# Allegro board DDS.brd
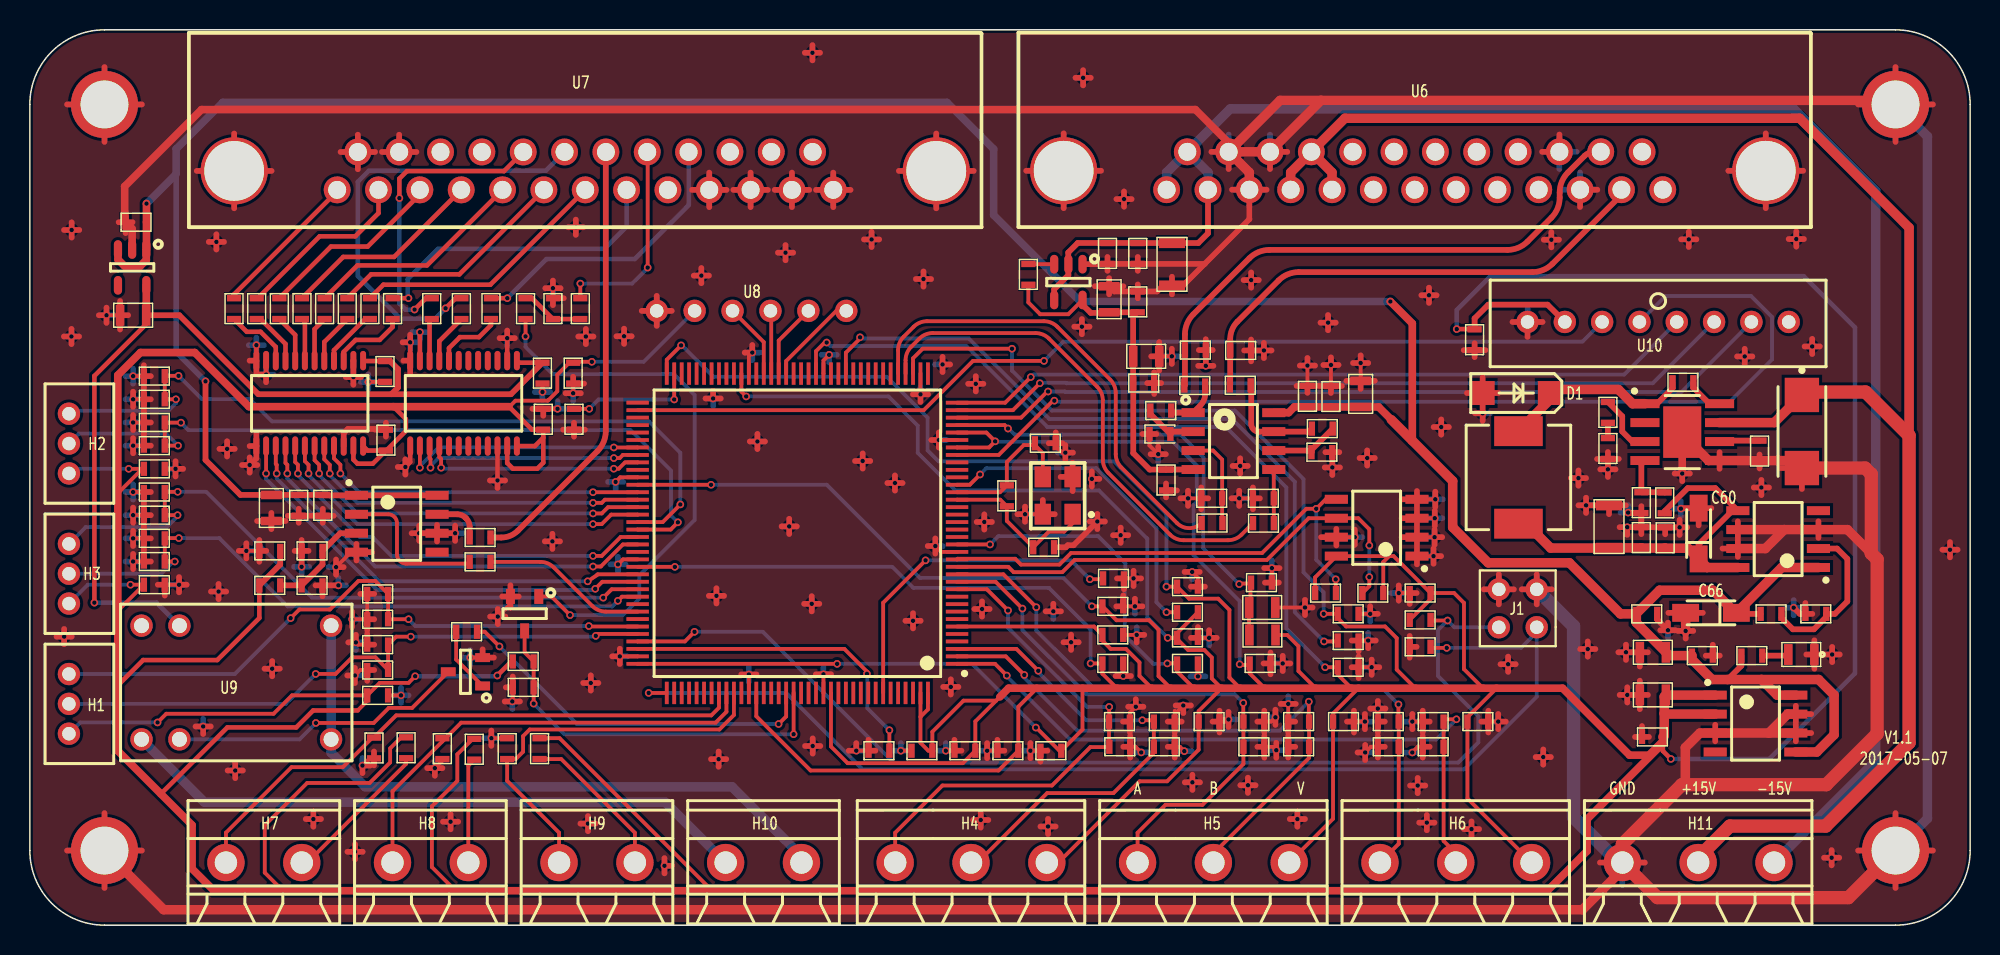
[diagram p0: board, top side]
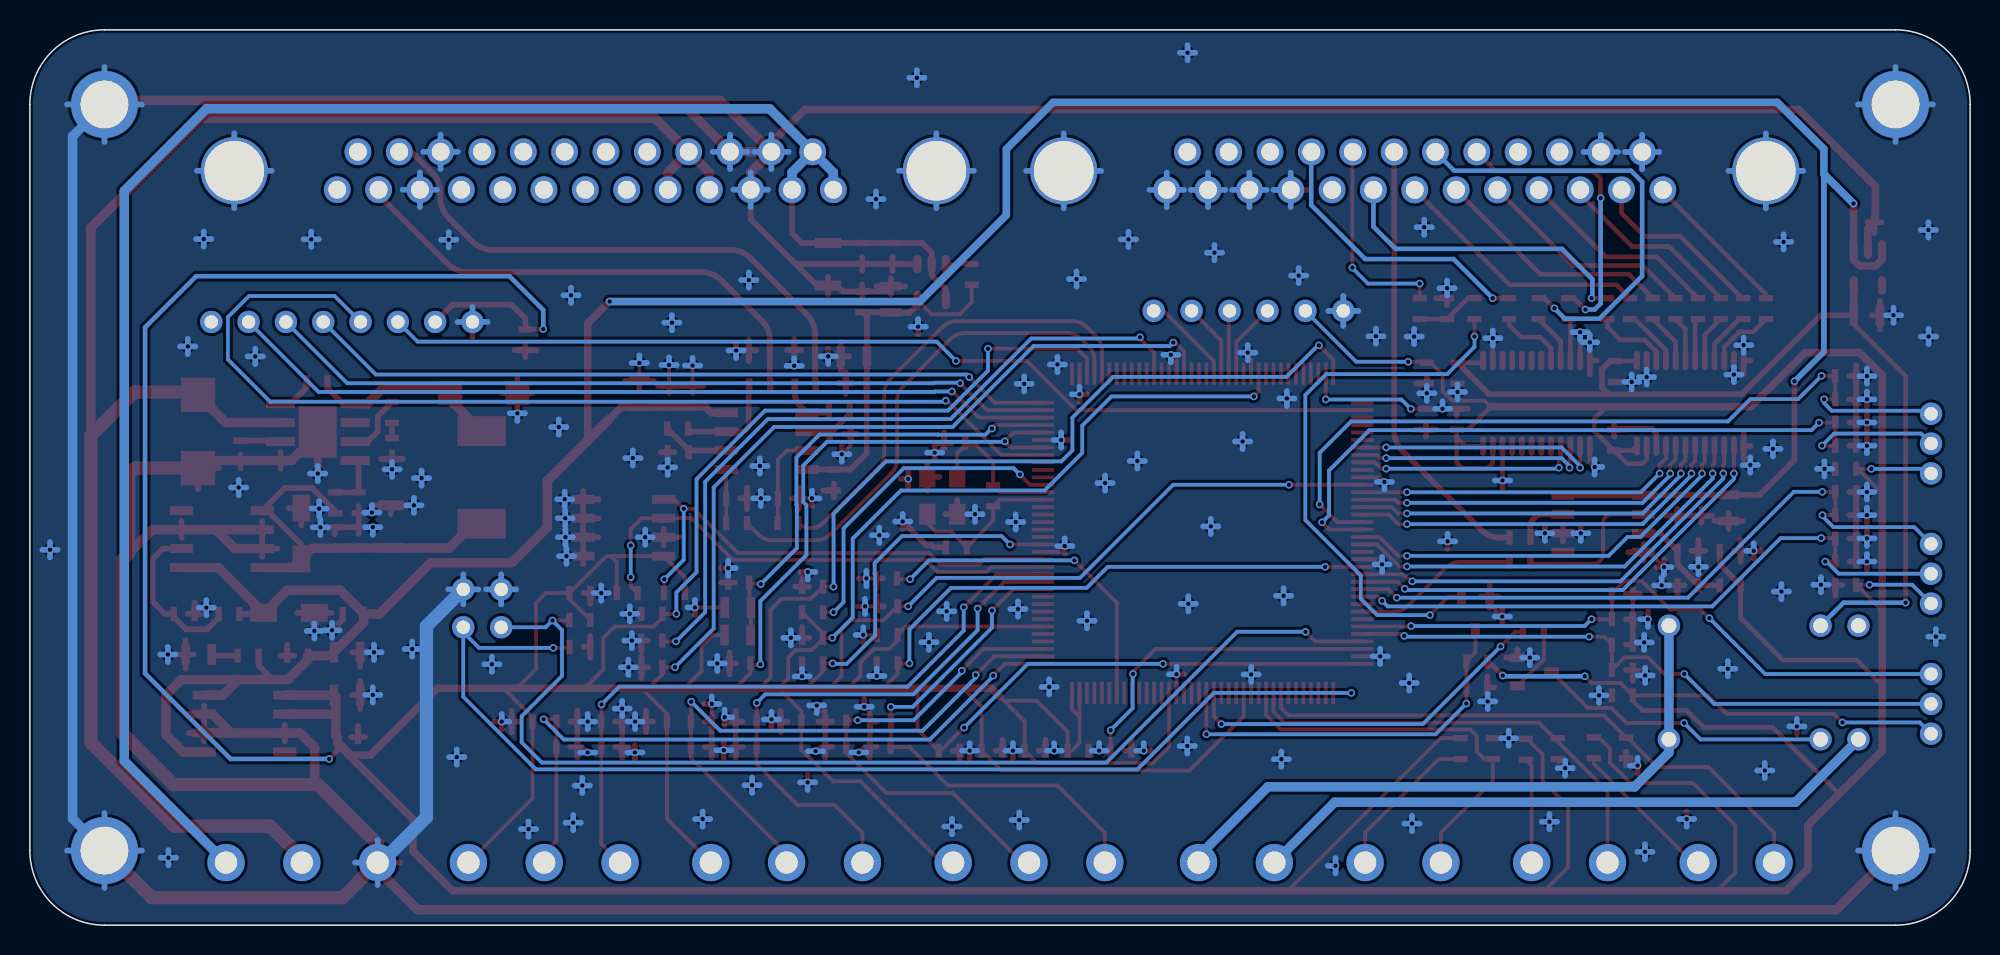
[diagram p1: board, bottom side, seen from below]

Outline 130 x 60 mm; copper layers: TOP, BOTTOM. Coordinates in mm from the lower left corner of the outline.
Outline path: 0,55 0,5 arc(1.46,1.46) 5,0 125,0 arc(128.54,1.46) 130,5 130,55 arc(128.54,58.54) 125,60 5,60 arc(1.46,58.54) 0,55

## Placement (name value [footprint] x y rotation side)
C1  0.1uF  [0603]  18.01 28.13 270 top
C2  10uF  [0805]  16.18 27.96 270 top
C3  0.1uF  [0603]  16.08 25.08 0 top
C4  0.1uF  [0603]  18.91 22.77 180 top
C5  1nF  [0603]  78.09 38.54 0 top
C6  0.1uF  [0603]  87.17 35.43 90 top
C7  10uF  [0805]  89.16 35.6 90 top
C8  1nF  [0603]  81.12 38.51 0 top
C9  1nF  [0603]  79.19 28.6 0 top
C10  1nF  [0603]  82.65 28.6 0 top
C11  10uF  [0805]  82.57 21.29 0 top
C12  0.1uF  [0603]  82.52 22.96 0 top
C13  2.2uF  [0603]  36.46 33.9 90 top
C14  2.2uF  [0603]  56.89 11.69 0 top
C15  22pF  [0603]  67.93 25.33 0 top
C16  22pF  [0603]  68.04 32.3 180 top
C17  0.1uF  [0603]  77.56 22.69 180 top
C18  0.1uF  [0603]  88.33 20.86 180 top
C19  0.1uF  [0603]  72.56 21.37 180 top
C20  0.1uF  [0603]  72.56 19.45 180 top
C21  0.1uF  [0603]  72.56 17.54 180 top
C22  0.1uF  [0603]  77.56 19.26 180 top
C23  0.1uF  [0603]  82.43 17.54 180 top
C24  0.1uF  [0603]  88.33 17.28 180 top
C25  0.1uF  [0603]  77.56 17.54 180 top
C26  0.1uF  [0603]  59.77 11.69 0 top
C27  0.1uF  [0603]  62.65 11.69 0 top
C28  0.1uF  [0603]  65.53 11.69 0 top
C29  0.1uF  [0603]  68.41 11.69 0 top
C30  0.1uF  [0603]  23.86 32.51 270 top
C31  0.1uF  [0603]  34.4 33.9 270 top
C32  0.1uF  [0603]  34.35 36.99 90 top
C33  0.1uF  [0603]  23.8 37.11 90 top
C34  0.1uF  [0603]  23.3 20.5 0 top
C35  0.1uF  [0603]  23.3 18.8 0 top
C36  0.1uF  [0603]  8.34 36.79 0 top
C37  0.1uF  [0603]  8.34 33.69 0 top
C38  0.1uF  [0603]  8.34 29.03 0 top
C39  0.1uF  [0603]  8.34 25.92 0 top
C40  0.1uF  [0603]  73 13.64 180 top
C41  0.1uF  [0603]  76.01 13.64 180 top
C42  0.1uF  [0603]  82.01 13.64 180 top
C43  0.1uF  [0603]  85.01 13.64 0 top
C44  0.1uF  [0603]  23.3 15.4 0 top
C45  0.1uF  [0603]  8.34 30.58 0 top
C46  0.1uF  [0603]  8.34 22.81 0 top
C47  0.1uF  [0603]  79.01 13.64 0 top
C48  0.1uF  [0603]  88.01 13.64 0 top
C49  0.1uF  [0603]  91.02 13.64 0 top
C50  0.1uF  [0603]  94.02 13.64 0 top
C51  0.1uF  [0603]  33.05 15.93 180 top
C52  0.1uF  [0603]  23.06 11.87 270 top
C53  0.1uF  [0603]  27.64 11.83 270 top
C54  0.1uF  [0603]  31.98 11.83 90 top
C55  0.1uF  [0603]  97.02 13.64 0 top
C56  0.1uF  [0603]  93.15 22.26 0 top
C57  0.1uF  [0603]  36.4 36.99 90 top
C58  0.1uF  [0603]  96.8 39.23 90 top
C59  150PF  [0603]  105.73 34.36 90 top
C60  10uF10V  [CAP-3216]  111.81 24.55 90 top
C61  0.1uF  [0603]  109.57 25.96 90 top
C62  10uF35V  [CAP-6032]  118.73 33.08 270 top
C63  0.1uF  [0603]  110.76 36.38 0 top
C64  0.1uF  [0603]  107.97 25.97 90 top
C65  22uF  [1206]  105.81 26.71 270 top
C66  10uF10V  [CAP-3216]  114.34 20.93 180 top
C67  0.1uF  [0603]  108.34 20.86 0 top
C68  10uF  [0805]  108.74 18.29 180 top
C69  0.1uF  [0603]  112.06 18.06 0 top
C70  0.1uF  [0603]  108.71 12.62 180 top
C71  10uF  [0805]  108.74 15.43 180 top
C72  0.1uF  [0603]  19.63 28.13 270 top
C73  0.1uF  [0603]  85.6 35.44 90 top
C74  0.1uF  [0603]  76.13 29.83 90 top
C75  0.1uF  [0603]  74.63 36.33 180 top
C76  10uF  [0805]  74.8 38.12 180 top
C77  0.01uF  [0603]  66.9 43.61 90 top
C78  22uF  [1206]  76.52 44.29 270 top
C79  1uF  [0603]  74.23 45.02 270 top
C80  0.1uF  [0603]  72.2 45.02 270 top
C81  0.1uF  [0603]  74.23 41.77 270 top
C82  10uF  [0805]  72.31 41.94 270 top
C83  10uF  [0805]  6.92 40.87 0 top
C84  1uF  [0603]  7.11 47.11 0 top
D1  B340A-13-F  [SMA]  101.84 35.66 180 top
H1  Header3  [DUANZI-3P-200]  2.62 12.83 90 top
H2  Header3  [DUANZI-3P-200]  2.62 30.27 90 top
H3  Header3  [DUANZI-3P-200]  2.62 21.55 90 top
H4  Header3  [DUANZI-3P-508]  68.14 4.19 180 top
H5  Header3  [DUANZI-3P-508]  84.38 4.19 180 top
H6  Header3  [DUANZI-3P-508]  100.62 4.19 180 top
H7  Header2  [DUANZI-2P-508]  18.22 4.19 180 top
H8  Header2  [DUANZI-2P-508]  29.38 4.19 180 top
H9  Header2  [DUANZI-2P-508]  40.54 4.19 180 top
H10  Header2  [DUANZI-2P-508]  51.7 4.19 180 top
H11  Header3  [DUANZI-3P-508]  116.86 4.19 180 top
J1  Header2*2  [H-2-2]  100.96 19.96 180 top
L1  10uH  [0805]  82.58 19.44 180 top
L2  15uH  [L-7-7-3]  99.74 30.01 270 top
M1  MTG  [MTG-450-320]  5 5 0 top
M2  MTG  [MTG-450-320]  125 5 0 top
M3  MTG  [MTG-450-320]  5 55 0 top
M4  MTG  [MTG-450-320]  125 55 0 top
NOREF  -  []  125 5 90 top
NOREF#2  -  []  0 0 90 top
NOREF#3  -  []  5 5 0 top
NOREF#4  -  []  0 0 0 top
O1  8M  [OSC-3225]  68.87 28.79 180 top
Q1  S9014  [S9014-SOT23]  33.15 20.88 270 top
Q2  S9014  [S9014-SOT23]  29.18 16.98 180 top
R1  1K  [0603]  30.16 24.34 0 top
R3  50R  [0603]  30.16 25.98 180 top
R4  10K  [0603]  16.08 22.77 180 top
R5  10K  [0603]  18.91 25.08 0 top
R6  50R  [0603]  78.05 36.16 180 top
R7  50R  [0603]  81.1 36.18 0 top
R8  10K  [0603]  75.77 34.49 180 top
R9  20K  [0603]  75.71 32.91 180 top
R10  10K  [0603]  86.59 33.27 180 top
R11  50R  [0603]  79.21 26.95 180 top
R12  20K  [0603]  86.57 31.7 180 top
R13  50R  [0603]  82.65 26.94 0 top
R14  10K  [0603]  77.56 20.97 0 top
R15  1M  [0603]  65.46 28.77 270 top
R16  10K  [0603]  93.15 18.65 180 top
R17  10K  [0603]  93.15 20.45 0 top
R18  10K  [0603]  72.61 23.24 180 top
R19  10K  [0603]  88.33 19.07 180 top
R20  1K  [0603]  13.68 41.32 270 top
R21  1K  [0603]  16.72 41.32 270 top
R22  1K  [0603]  18.23 41.32 270 top
R23  1K  [0603]  21.27 41.32 270 top
R24  1K  [0603]  15.2 41.32 270 top
R25  1K  [0603]  19.75 41.32 270 top
R26  1K  [0603]  22.78 41.32 270 top
R27  1K  [0603]  24.3 41.32 270 top
R28  1K  [0603]  30.9 41.32 90 top
R29  1K  [0603]  28.91 41.32 90 top
R30  1K  [0603]  26.93 41.32 90 top
R31  10K  [0603]  23.3 22.2 180 top
R32  10K  [0603]  8.34 35.24 180 top
R33  10K  [0603]  8.34 27.47 180 top
R34  10K  [0603]  73.03 11.95 0 top
R35  10K  [0603]  82.01 11.95 0 top
R36  10K  [0603]  25.21 11.89 270 top
R37  10K  [0603]  29.77 11.79 270 top
R38  10K  [0603]  34.15 11.83 270 top
R39  10K  [0603]  33.05 17.67 0 top
R40  2K  [0603]  36.88 41.32 270 top
R41  10K  [0603]  91.02 11.95 180 top
R42  4.7K  [0603]  33.21 41.32 270 top
R43  3K  [0603]  35.05 41.32 90 top
R44  10K  [0603]  89.98 22.25 180 top
R45  10K  [0603]  86.81 22.25 0 top
R46  4.7K  [0603]  29.26 19.66 0 top
R47  20K  [0603]  107.97 28.31 270 top
R48  1K  [0603]  119.66 20.86 0 top
R49  120K  [0603]  109.54 28.3 90 top
R50  100K  [0603]  115.89 31.77 270 top
R51  100K  [0603]  105.73 31.94 90 top
R52  3.1K  [0603]  116.66 20.86 180 top
R53  2K  [0603]  115.37 18.06 180 top
R54  10K  [0603]  23.3 17.1 180 top
R55  10K  [0603]  8.34 32.13 180 top
R56  10K  [0603]  8.34 24.37 180 top
R57  10K  [0603]  76.01 11.95 0 top
R58  10K  [0603]  85.01 11.95 180 top
R59  10K  [0603]  94.02 11.95 180 top
U1  MAX903  [LM334SM-SOP8]  24.58 26.9 0 top
U2  OPA2350  [LM334SM-SOP8]  80.64 32.44 0 top
U3  STM32F407ZGT6  [STM32F407ZGT6-LQFP144]  51.42 26.26 180 top
U4  74LVC4245  [74LVC4245-PW]  18.75 34.97 270 top
U5  74LVC4245  [74LVC4245-PW]  29.06 34.97 270 top
U6  DB25G  [DB25-G]  109.4 49.29 180 top
U7  DB25M  [DB25-M]  53.83 49.28 180 top
U8  0.96LCD  [OLED]  42 41.17 0 top
U9  HK4100F-DC5V-SHG  [HK4100F]  7.48 20.07 0 top
U10  Header8  [XH254-8P]  100.34 40.42 0 top
U11  AT24C02  [AT24C02-SOIC]  90.24 26.64 180 top
U12  MP1584  [MP1584-SOIC8]  110.71 33.04 0 top
U13  LT1963A  [LT1963-SOP8]  117.14 25.87 180 top
U14  LT1963-3.3  [LT1963-SOP8]  115.62 13.51 0 top
U15  RED  [LED0805]  118.69 18.14 0 top
U16  LT1964-5  [LT1964-5-SOT23]  69.58 43.1 270 top
U17  NCV551SN50T1  [LT1964-5-SOT23]  6.85 44.08 270 top

## Library data of the parts
C1-C59 C61 C63-C65 C67-C84 = Cap
C60 C62 C66 = Cap+
D1 = 1n5819
H1-H6 H11 = Header3
H7-H10 = Header2
J1 = Header2*2
L1 L2 = Inductor
M1-M4 = MTG
O1 = OSC-N
Q1 Q2 = S9014
R1 R3-R59 = Res
U1 = MAX903
U2 = AD8622
U3 = STM32F407ZGT6
U4 U5 = 74LVC4245
U6 U7 = DB25
U8 = 0.96LCD
U9 = HK4100F-DC5V-SHG
U10 = Header8
U11 = AT24C02
U12 = MP1584
U13 U14 = LT1963
U15 = LED
U16 = LT1964-5
U17 = NCV551SN50T1

## Footprints (pads in the part's own frame, mm; a bottom-side part is the same pattern mirrored in y, then rotated)
74LVC4245-PW
  oval 1.3x0.4 smd: 1(-2.863,3.575) 2(-2.863,2.925) 3(-2.863,2.275) 4(-2.863,1.625) 5(-2.863,0.975) 6(-2.863,0.325) 7(-2.863,-0.325) 8(-2.863,-0.975) 9(-2.863,-1.625) 10(-2.863,-2.275) 11(-2.863,-2.925) 12(-2.863,-3.575) 13(2.863,-3.575) 14(2.863,-2.925) 15(2.863,-2.275) 16(2.863,-1.625) 17(2.863,-0.975) 18(2.863,-0.325) 19(2.863,0.325) 20(2.863,0.975) 21(2.863,1.625) 22(2.863,2.275) 23(2.863,2.925) 24(2.863,3.575)
0603
  rect 0.425x0.95 smd: 1(-0.7,0) 2(0.7,0)
0805
  rect 0.575x1.4 smd: 1(-0.875,0) 2(0.875,0)
1206
  rect 0.675x1.75 smd: 1(-1.425,0) 2(1.425,0)
AT24C02-SOIC
  rect 1.55x0.6 smd: 1(-2.7,1.905) 2(-2.7,0.635) 3(-2.7,-0.635) 4(-2.7,-1.905) 5(2.7,-1.905) 6(2.7,-0.635) 7(2.7,0.635) 8(2.7,1.905)
CAP-3216
  rect 1.8x1.2 smd: 1(0,0) 2(3.4,0)
CAP-6032
  rect 2.3x2.3 smd: 1(-2.45,0) 2(2.45,0)
DB25-G
  round 1.8 hole 1.2: 1(0,0) 2(2.77,0) 3(5.54,0) 4(8.31,0) 5(11.08,0) 6(13.85,0) 7(16.62,0) 8(19.39,0) 9(22.16,0) 10(24.93,0) 11(27.7,0) 12(30.47,0) 13(33.24,0) 14(1.385,-2.54) 15(4.155,-2.54) 16(6.925,-2.54) 17(9.695,-2.54) 18(12.465,-2.54) 19(15.235,-2.54) 20(18.005,-2.54) 21(20.775,-2.54) 22(23.545,-2.54) 23(26.315,-2.54) 24(29.085,-2.54) 25(31.855,-2.54)
  round 4.5 hole 4: 26(-6.9,-1.27) 27(40.14,-1.27)
DB25-M
  round 1.8 hole 1.2: 1(33.24,0) 2(30.47,0) 3(27.7,0) 4(24.93,0) 5(22.16,0) 6(19.39,0) 7(16.62,0) 8(13.85,0) 9(11.08,0) 10(8.31,0) 11(5.54,0) 12(2.77,0) 13(0,0) 14(31.855,-2.54) 15(29.085,-2.54) 16(26.315,-2.54) 17(23.545,-2.54) 18(20.775,-2.54) 19(18.005,-2.54) 20(15.235,-2.54) 21(12.465,-2.54) 22(9.695,-2.54) 23(6.925,-2.54) 24(4.155,-2.54) 25(1.385,-2.54)
  round 4.5 hole 4: 26(-6.9,-1.27) 27(40.14,-1.27)
DUANZI-2P-508
  round 2.5 hole 1.5: 1(0,0) 2(5.08,0)
DUANZI-3P-200
  round 1.5 hole 0.9: 1(0,0) 2(2,0) 3(4,0)
DUANZI-3P-508
  round 2.5 hole 1.5: 1(0,0) 2(5.08,0) 3(10.16,0)
H-2-2
  round 1.5 hole 0.9: 1(0,0) 2(2.54,0) 3(0,-2.54) 4(2.54,-2.54)
HK4100F
  round 1.5 hole 1: 1(0,0) 2(0,-7.62) 3(2.54,0) 4(2.54,-7.62) 5(12.7,0) 6(12.7,-7.62)
L-7-7-3
  rect 2x3.25 smd: 1(-3.1,0) 2(3.1,0)
LED0805
  rect 0.575x1.4 smd: 1(-0.875,0) 2(0.875,0)
LM334SM-SOP8
  rect 1.55x0.6 smd: 1(-2.7,1.905) 2(-2.7,0.635) 3(-2.7,-0.635) 4(-2.7,-1.905) 5(2.7,-1.905) 6(2.7,-0.635) 7(2.7,0.635) 8(2.7,1.905)
LT1963-SOP8
  rect 1.55x0.6 smd: 1(-2.7,1.905) 2(-2.7,0.635) 3(-2.7,-0.635) 4(-2.7,-1.905) 5(2.7,-1.905) 6(2.7,-0.635) 7(2.7,0.635) 8(2.7,1.905)
LT1964-5-SOT23
  oval 1.25x0.55 smd: 1(-1.2,0.95) 2(-1.2,0) 3(-1.2,-0.95) 4(1.2,-0.95) 5(1.2,0.95)
MP1584-SOIC8
  rect 1.95x0.6 smd: 1(-2.5,1.905) 2(-2.5,0.635) 3(-2.5,-0.635) 4(-2.5,-1.905) 5(2.5,-1.905) 6(2.5,-0.635) 7(2.5,0.635) 8(2.5,1.905)
  rect 2.55x3.45 smd: 9(0,0)
MTG-450-320
  round 4.5 hole 3.2: 1(0,0)
OLED
  round 1.5 hole 0.9: 1(0,0) 2(2.54,0) 3(5.08,0) 4(7.62,0) 5(10.16,0) 6(12.7,0)
OSC-3225
  rect 1.1x1.4 smd: 1(-1,1.25) 2(-1,-1.25) 3(1,-1.25) 4(1,1.25)
S9014-SOT23
  rect 1x0.6 smd: 1(-1.15,0.95) 2(-1.15,-0.95) 3(1.15,0)
SMA
  rect 1.6x1.6 smd: 1(0,0) 2(4.5,0)
STM32F407ZGT6-LQFP144
  rect 1.5x0.254 smd: 1(-10.7,8.75) 2(-10.7,8.25) 3(-10.7,7.75) 4(-10.7,7.25) 5(-10.7,6.75) 6(-10.7,6.25) 7(-10.7,5.75) 8(-10.7,5.25) 9(-10.7,4.75) 10(-10.7,4.25) 11(-10.7,3.75) 12(-10.7,3.25) 13(-10.7,2.75) 14(-10.7,2.25) 15(-10.7,1.75) 16(-10.7,1.25) 17(-10.7,0.75) 18(-10.7,0.25) 19(-10.7,-0.25) 20(-10.7,-0.75) 21(-10.7,-1.25) 22(-10.7,-1.75) 23(-10.7,-2.25) 24(-10.7,-2.75) 25(-10.7,-3.25) 26(-10.7,-3.75) 27(-10.7,-4.25) 28(-10.7,-4.75) 29(-10.7,-5.25) 30(-10.7,-5.75) 31(-10.7,-6.25) 32(-10.7,-6.75) 33(-10.7,-7.25) 34(-10.7,-7.75) 35(-10.7,-8.25) 36(-10.7,-8.75) 73(10.7,-8.75) 74(10.7,-8.25) 75(10.7,-7.75) 76(10.7,-7.25) 77(10.7,-6.75) 78(10.7,-6.25) 79(10.7,-5.75) 80(10.7,-5.25) 81(10.7,-4.75) 82(10.7,-4.25) 83(10.7,-3.75) 84(10.7,-3.25) 85(10.7,-2.75) 86(10.7,-2.25) 87(10.7,-1.75) 88(10.7,-1.25) 89(10.7,-0.75) 90(10.7,-0.25) 91(10.7,0.25) 92(10.7,0.75) 93(10.7,1.25) 94(10.7,1.75) 95(10.7,2.25) 96(10.7,2.75) 97(10.7,3.25) 98(10.7,3.75) 99(10.7,4.25) 100(10.7,4.75) 101(10.7,5.25) 102(10.7,5.75) 103(10.7,6.25) 104(10.7,6.75) 105(10.7,7.25) 106(10.7,7.75) 107(10.7,8.25) 108(10.7,8.75)
  rect 0.254x1.5 smd: 37(-8.75,-10.7) 38(-8.25,-10.7) 39(-7.75,-10.7) 40(-7.25,-10.7) 41(-6.75,-10.7) 42(-6.25,-10.7) 43(-5.75,-10.7) 44(-5.25,-10.7) 45(-4.75,-10.7) 46(-4.25,-10.7) 47(-3.75,-10.7) 48(-3.25,-10.7) 49(-2.75,-10.7) 50(-2.25,-10.7) 51(-1.75,-10.7) 52(-1.25,-10.7) 53(-0.75,-10.7) 54(-0.25,-10.7) 55(0.25,-10.7) 56(0.75,-10.7) 57(1.25,-10.7) 58(1.75,-10.7) 59(2.25,-10.7) 60(2.75,-10.7) 61(3.25,-10.7) 62(3.75,-10.7) 63(4.25,-10.7) 64(4.75,-10.7) 65(5.25,-10.7) 66(5.75,-10.7) 67(6.25,-10.7) 68(6.75,-10.7) 69(7.25,-10.7) 70(7.75,-10.7) 71(8.25,-10.7) 72(8.75,-10.7) 109(8.75,10.7) 110(8.25,10.7) 111(7.75,10.7) 112(7.25,10.7) 113(6.75,10.7) 114(6.25,10.7) 115(5.75,10.7) 116(5.25,10.7) 117(4.75,10.7) 118(4.25,10.7) 119(3.75,10.7) 120(3.25,10.7) 121(2.75,10.7) 122(2.25,10.7) 123(1.75,10.7) 124(1.25,10.7) 125(0.75,10.7) 126(0.25,10.7) 127(-0.25,10.7) 128(-0.75,10.7) 129(-1.25,10.7) 130(-1.75,10.7) 131(-2.25,10.7) 132(-2.75,10.7) 133(-3.25,10.7) 134(-3.75,10.7) 135(-4.25,10.7) 136(-4.75,10.7) 137(-5.25,10.7) 138(-5.75,10.7) 139(-6.25,10.7) 140(-6.75,10.7) 141(-7.25,10.7) 142(-7.75,10.7) 143(-8.25,10.7) 144(-8.75,10.7)
XH254-8P
  round 1.5 hole 0.9: 1(0,0) 2(2.5,0) 3(5,0) 4(7.5,0) 5(10,0) 6(12.5,0) 7(15,0) 8(17.5,0)

## Nets
GND: C1.2 C2.2 C3.1 C4.1 C5.2 C6.2 C7.2 C8.2 C9.1 C10.1 C11.2 C12.2 C13.1 C14.1 C15.2 C16.1 C17.1 C18.1 C19.1 C20.1 C21.1 C22.1 C23.1 C24.1 C25.1 C26.1 C27.1 C28.1 C29.1 C30.1 C31.1 C32.1 C33.1 C34.1 C35.1 C36.1 C37.1 C38.1 C39.1 C40.1 C41.1 C42.1 C43.1 C44.2 C45.2 C46.2 C47.2 C48.2 C49.1 C50.1 C51.2 C52.2 C53.2 C54.2 C55.2 C56.1 C57.1 C58.1 C60.2 C61.2 C62.2 C64.2 C65.1 C66.2 C67.2 C68.2 C69.2 C70.2 C71.2 C72.2 C73.2 C74.1 C75.1 C76.1 C78.2 C79.2 C80.2 C81.1 C82.1 C83.1 C84.1 D1.2 H11.3 J1.3 J1.4 M1.1 M2.1 M3.1 M4.1 O1.2(GND1) O1.4(GND2) Q1.2(E) Q2.2(E) R5.1 R9.2 R12.1 R16.2 R18.1 R19.1 R31.2 R32.2 R33.2 R34.2 R35.2 R41.2 R43.2 R47.2 R48.1 R50.2 R51.1 R54.2 R55.2 R56.2 R57.2 R58.2 R59.2 U1.4(VEE) U1.6(GND) U3.16(VSS1) U3.31(VSSA) U3.38(VSS2) U3.51(VSS3) U3.61(VSS4) U3.83(VSS5) U3.94(VSS6) U3.107(VSS7) U3.120(VSS8) U3.130(VSS9) U4.2(DIR) U4.11(GND1) U4.12(GND2) U4.13(GND3) U4.22(O\E\) U5.2(DIR) U5.11(GND1) U5.12(GND2) U5.13(GND3) U5.22(O\E\) U6.3 U6.11 U6.16 U6.23 U6.24 U6.26 U6.27 U7.10 U7.11 U7.12 U7.13 U7.14 U7.15 U7.26 U7.27 U8.1(GND) U10.1 U11.1(A0) U11.2(A1) U11.3(A2) U11.4(GND) U11.7(WP) U12.5(GND) U12.9(GND-PAD) U13.3(GND1) U13.6(GND2) U13.7(GND3) U14.3(GND1) U14.6(GND2) U14.7(GND3) U15.2 U16.1(GND) U17.2(GND)
VCC5: C32.2 C33.2 C83.2 U4.1(VCC(A)) U5.1(VCC(A)) U9.3 U17.5(OUT)
VCC5.6: C1.1 C2.1 C6.1 C7.1 C66.1 C67.1 C68.1 C69.1 C72.1 C73.1 C84.2 R52.2 R53.2 U1.1(VCC) U1.8(VDD) U2.8(V+) U13.1(OUT) U14.5(S\H\D\N\) U14.8(IN) U17.1(VIN) U17.3(EN)
VCC15: C62.1 H11.2 U6.9 U6.10 U6.22 U12.7(VIN)
VCC-5: C74.2 C75.2 C76.2 C77.1 C81.2 C82.2 U2.4(V-) U16.5(OUT)
VCC-15: C78.1 C79.1 C80.1 H11.1 U6.12 U6.13 U6.25 U16.2(IN) U16.4(S\H\D\N\)
VDD3.3: C3.2 C17.2 C18.2 C19.2 C20.2 C21.2 C22.2 C23.2 C24.2 C25.2 C26.2 C27.2 C28.2 C29.2 C30.2 C31.2 C44.1 C45.1 C46.1 C47.1 C48.1 C55.1 C56.2 C57.2 C58.2 C70.1 C71.1 H1.1 H2.1 H3.1 H4.1 H5.1 H6.1 L1.1 R4.2 R14.2 R17.1 R36.1 R37.1 R38.1 R39.1 R44.1 R45.1 U3.6(VBAT) U3.17(VDD1) U3.30(VDD2) U3.32(VREF+) U3.39(VDD3) U3.52(VDD4) U3.62(VDD5) U3.72(VDD6) U3.84(VDD7) U3.95(VDD8) U3.108(VDD9) U3.121(VDD10) U3.131(VDD11) U3.143(PDR_ON) U3.144(VDD12) U4.23(VCC(B)2) U4.24(VCC(B)1) U5.23(VCC(B)2) U5.24(VCC(B)1) U8.2(VCC) U10.2 U11.8(VCC) U14.1(OUT) U14.2(SENSE/ADJ)
BOOT0: R18.2 U3.138(BOOT0)
BOOT1: R19.2 U3.48(PB2/BOOT1)
OSC_IN: C15.1 O1.1(X1) R15.2 U3.23(OSC_IN)
OSC_OUT: C16.2 O1.3(X2) R15.1 U3.24(OSC_OUT)
RELAYC: R40.1 U7.21
TCK: J1.1 R16.1 U3.109(PA14/JTCK)
TMS: J1.2 R17.2 U3.105(PA13/JTMS)
VCAP_1: C13.2 U3.71(VCAP_1)
VCAP_2: C14.2 U3.106(VCAP_2)
N00261: R1.2 U3.101(PA9)
N00265: R11.2 U3.41(PA5)
N00269: R13.1 U3.40(PA4)
N00273: C5.1 R6.2 U6.15
N00285: R3.1 U7.20
N00289: C8.1 R7.1 U6.2
N00322: U3.85(PD14) U4.21(B1)
N00366: U3.86(PD15) U4.20(B2)
N00370: U3.87(PG2) U4.19(B3)
N00374: U3.88(PG3) U4.18(B4)
N00378: U3.91(PG6) U4.17(B5)
N00382: U3.92(PG7) U4.16(B6)
N00386: U3.96(PC6) U4.15(B7)
N00394: U3.97(PC7) U4.14(B8)
N00427: U3.79(PD10) U5.14(B8)
N00431: U3.80(PD11) U5.15(B7)
N00435: U3.81(PD12) U5.16(B6)
N00439: C34.2 H1.3 R31.1 U3.103(PA11)
N00443: C35.2 H1.2 R54.1 U3.104(PA12)
N00447: C36.2 H2.3 R32.1 U3.89(PG4)
N00451: C37.2 H2.2 R55.1 U3.90(PG5)
N00455: C38.2 H3.3 R33.1 U3.98(PC8)
N00459: C39.2 H3.2 R56.1 U3.99(PC9)
N00463: C40.2 H4.3 R34.1 U3.11(PF1)
N00467: C41.2 H4.2 R57.1 U3.3(PE4)
N00471: C42.2 H5.3 R35.1 U3.12(PF2)
N00475: C43.2 H5.2 R58.1 U3.2(PE3)
N00479: C49.2 H6.3 R41.1 U3.13(PF3)
N00483: C50.2 H6.2 R59.1 U3.1(PE2)
N00487: C52.1 H7.2 U3.116(PD2)
N00491: C53.1 H8.2 U3.117(PD3)
N00495: C54.1 H9.2 U3.118(PD4)
N00499: R46.2 U3.125(PG10)
N00503: C51.1 Q1.3(C) R39.2 U3.126(PG11)
N00507: U3.58(PE7) U8.4(SDA)
N00511: U3.59(PE8) U8.3(SCL)
N00515: U3.56(PG0) U8.6(D/C)
N00519: U3.57(PG1) U8.5(RST)
N00523: U3.35(PA1) U10.6
N00527: U3.36(PA2) U10.5
N00531: U3.34(PA0) U10.7
N00535: U3.29(PC3) U10.4
N00539: U3.74(PB13) U10.3
N00543: R44.2 U3.14(PF4) U11.6(SCL)
N00553: R45.2 U3.15(PF5) U11.5(SDA)
N000601: R1.1 U1.2(IN+)
N001382: R27.2 U4.3(A1)
N001383: R26.2 U4.4(A2)
N001384: R23.2 U4.5(A3)
N001385: R25.2 U4.6(A4)
N001386: R22.2 U4.7(A5)
N001387: R21.2 U4.8(A6)
N001388: R24.2 U4.9(A7)
N001389: R20.2 U4.10(A8)
N001987: R28.1 U5.8(A6)
N001988: R29.1 U5.9(A7)
N001989: R30.1 U5.10(A8)
N0056914: R14.1 U3.25(NRST)
N127673: C4.2 R4.1 R5.2 U1.3(IN-)
N127709: R20.1 U7.1
N127713: R24.1 U7.2
N127717: R21.1 U7.3
N127721: R22.1 U7.4
N127725: R25.1 U7.5
N127729: R23.1 U7.6
N127733: R26.1 U7.7
N127737: R27.1 U7.8
N129107: Q2.1(B) R46.1
N129275: H10.2 U9.2
N129286: H10.1 U9.5 U9.6
N190842: C60.1 C61.1 C64.1 C65.2 L2.2 R49.1 U13.5(S\H\D\N\) U13.8(IN)
N190898: C63.1 D1.1 L2.1 U12.1(SW)
N190958: C63.2 U12.8(BST)
N191018: C59.2 U12.3(COMP)
N191038: C59.1 R51.2
N191046: R47.1 R49.2 U12.4(FB)
N191114: R50.1 U12.6(FREQ)
N191854: R48.2 R52.1 U13.2(SENSE/ADJ)
N193322: R3.2 U1.7(OUT)
N193887: R8.2 R9.1 U2.2(-IN A)
N194020: R6.1 R8.1 U2.1(OUTA)
N194103: C9.2 R11.1 U2.3(+IN A)
N195216: R10.1 R12.2 U2.6(-IN B)
N195228: R7.2 R10.2 U2.7(OUTB)
N195578: C10.2 R13.2 U2.5(+IN B)
N205725: C77.2 U16.3(BYP)
N216832: R29.2 U7.19
N216844: R30.2 U7.18
N216856: R28.2 U7.22
N217116: R40.2 R42.1 R43.1
N217120: Q1.1(B) R42.2
N221620: H7.1 R36.2
N221870: H8.1 R37.2
N222112: H9.1 R38.2
N229143: C11.1 C12.1 L1.2 U3.33(VDDA)
N1287604: Q2.3(C) U9.4
N2019270: R53.1 U15.1

Pads without a net: U1 5; U3 4 5 7 8 9 10 18 19 20 21 22 26 27 28 37 42 43 44 45 46 47 49 50 53 54 55 60 63 64 65 66 67 68 69 70 73 75 76 77 78 82 93 100 102 110 111 112 113 114 115 119 122 123 124 127 128 129 132 133 134 135 136 137 139 140 141 142; U5 3 4 5 6 7 17 18 19 20 21; U6 1 4 5 6 7 8 14 17 18 19 20 21; U7 9 16 17 23 24 25; U9 1; U10 8; U12 2; U13 4; U14 4; U17 4

## Via types
v1: diameter 0.508, hole 0.305, TOP to BOTTOM, 309 vias

## Routing (per net, layer and track width the routed paths; a pad name or vN(x,y) marks a point on that pad's centre or on a via; arc(x,y) is an arc through that point)
GND: length 1644
  TOP w0.254: R9.2 75.01,32.15 v1(75.6,31.56) ; v1(53.55,38.22) 53.17,37.84 U3.51 ; R19.1 v1(89.67,19.07) ; C57.1 v1(36.4,35.65) ; R34.2 74.08,11.95 v1(74.46,11.58) ; R31.2 C34.1 v1(21.59,20.5) ; R57.2 77.06,11.95 v1(77.35,11.66) ; C35.1 21.99,18.8 v1(21.84,18.95) ; C11.2 v1(85.43,21.29) ; C83.1 v1(5.14,40.87) ; C51.2 32.35,15.02 v1(32.33,14.99) ; Q2.2 v1(29.5,17.93) ; C23.1 v1(83.94,17.54) ; U11.4 v1(94.17,28.54) ; C27.1 v1(61.37,11.69) ; C7.2 v1(89.16,37.68) ; U3.130 v1(53.17,16.81) ; C17.1 78.26,23.29 v1(77.87,23.67) ; v1(60.67,25.41) 61.06,25.01 U3.16 ; U3.38 v1(59.67,35.57) ; U11.2 v1(94.12,26) ; C10.1 v1(81.03,28.6) ; C18.1 v1(89.8,20.86) ; U3.61 48.17,38.14 v1(48.4,38.37) ; v1(69.38,31.67) 69.16,31.67 68.74,32.09 C16.1 ; v1(77.28,14.72) 76.71,14.15 ; 76.71,14.15 76.71,14.37 ; 76.71,14.15 C41.1 ; C76.1 v1(76.51,38.12) ; C40.1 73.7,14.24 v1(74.1,14.64) ; v1(27.13,10.52) 27.64,11.03 C53.2 ; C45.2 v1(9.76,30.58) ; C37.1 v1(6.92,33.69) ; C73.2 v1(85.6,37.5) ; C48.2 v1(89.45,13.64) ; C6.2 v1(87.17,37.54) ; R18.1 v1(73.95,23.24) ; R43.2 v1(35.05,42.69) ; C55.2 v1(98.38,13.64) ; U11.1 v1(94.05,24.73) ; C56.1 v1(91.72,22.26) ; R54.2 22.14,17.1 v1(21.78,16.73) ; v1(80.31,13.78) 80.17,13.64 C47.2 ; C38.1 v1(6.92,29.03) ; C39.1 v1(6.92,25.92) ; v1(20.52,23.99) 21.52,24.99 U1.4 ; v1(92.62,11.57) 92.62,11.59 92.99,11.95 R59.2 ; C19.1 v1(74.04,21.37) ; U3.94 39.74,24.51 v1(39.4,24.18) ; C12.2 v1(83.22,23.93) ; U11.3 v1(94.13,27.27) ; C28.1 v1(64.14,11.69) ; C54.2 v1(30.92,12.53) ; U3.31 v1(60.9,32.51) ; C20.1 v1(74.16,19.45) ; v1(31.35,20.68) 32.2,21.53 32.2,22.03 Q1.2 ; R56.2 v1(6.92,24.37) ; C44.2 v1(24.87,15.4) ; v1(22.28,10.69) 22.76,11.17 C52.2 ; C22.1 v1(79.01,19.26) ; R33.2 v1(6.92,27.47) ; C14.1 v1(55.37,11.69) ; C32.1 v1(34.35,35.73) ; U11.7 v1(88.77,26) ; U3.120 v1(48.17,16.8) ; C36.1 v1(6.92,36.79) ; R35.2 83.28,11.95 v1(83.51,11.72) ; C24.1 v1(89.9,17.28) ; C33.1 v1(22.68,36.41) ; C9.1 v1(77.6,28.6) ; R32.2 v1(6.92,35.24) ; C43.1 v1(84.31,14.83) ; U3.83 39.55,30.01 v1(39.25,29.7) ; C3.1 v1(14.5,25.08) ; C50.1 v1(92.63,13.64) ; R55.2 v1(6.92,32.13) ; C21.1 v1(73.26,16.7) ; C42.1 83.17,13.64 v1(83.45,13.93) ; v1(89.47,11.57) 89.85,11.95 R41.2 ; C46.2 v1(10,22.81) ; O1.4 v1(66.68,27.54) ; C49.1 v1(90.32,14.51) ; C29.1 v1(67.03,11.69) ; U3.107 v1(39.53,18.01) ; C26.1 v1(58.36,11.69) ; C25.1 v1(78.26,16.67)
  TOP w0.305: U5.2 v1(31.98,39.34) ; U5.12 v1(25.48,39.06) ; U4.12 v1(15.18,38.87) ; v1(25.16,30.71) 25.48,31.03 U5.13 ; U5.11 v1(26.13,39.74) ; C31.1 v1(35.35,34.6) ; U4.11 v1(15.83,36.9) ; U5.22 v1(31.33,29.8)
  TOP w0.381: C67.2 109.04,20.48 v1(109.75,19.76) ; 21.97,50.66 U7.14 ; U7.14 20.82,51.82 ; U7.14 23.13,51.82 ; U7.14 21.97,52.97 ; 31.89,15.93 C51.2 32.35,16.66 ; 118.35,45.47 v1(118.35,45.98) ; v1(118.35,45.98) 117.84,45.98 ; v1(118.35,45.98) 118.86,45.98 ; v1(118.35,45.98) 118.35,46.49 ; 9.76,30.07 v1(9.76,30.58) ; v1(9.76,30.58) 9.76,31.09 ; v1(9.76,30.58) 10.27,30.58 ; 22.14,22.2 R31.2 23.07,22.2 ; J1.3 101.96,22.5 ; J1.3 100.96,23.51 ; J1.3 100.96,21.5 ; J1.3 99.96,22.5 ; C82.1 73.27,42.82 ; C82.1 71.36,42.82 ; C82.1 72.66,42.47 C81.1 ; C82.1 72.31,43.36 ; C82.1 72.31,42.28 ; v1(10,22.81) 10,23.32 ; v1(10,22.81) 10,22.31 ; v1(10,22.81) 10.51,22.81 ; 34.54,42.69 v1(35.05,42.69) ; v1(35.05,42.69) 35.55,42.69 ; v1(35.05,42.69) 35.05,43.19 ; C74.1 76.85,29.13 ; C74.1 76.13,28.67 ; C74.1 76.13,29.6 ; v1(94.12,26) 94.12,26.51 ; v1(94.12,26) 94.12,25.49 ; v1(94.12,26) 94.62,26 ; 11.99,45.79 v1(12.5,45.79) ; v1(12.5,45.79) 12.5,46.3 ; v1(12.5,45.79) 13.01,45.79 ; v1(12.5,45.79) 12.5,45.28 ; v1(48.75,32.41) 48.75,32.92 ; v1(48.75,32.41) 48.75,31.9 ; v1(48.75,32.41) 49.25,32.41 ; v1(48.75,32.41) 48.24,32.41 ; v1(89.9,17.28) 90.41,17.28 ; v1(89.9,17.28) 89.9,17.79 ; v1(89.9,17.28) 89.9,16.78 ; v1(78.79,37.48) 79.3,37.48 ; v1(78.79,37.48) C5.2 ; v1(78.79,37.48) 78.28,37.48 ; 26.62,10.52 v1(27.13,10.52) ; v1(27.13,10.52) 27.13,10.01 ; v1(27.13,10.52) 27.64,10.52 ; 110.64,45.96 v1(111.15,45.96) ; v1(111.15,45.96) 111.66,45.96 ; v1(111.15,45.96) 111.15,46.47 ; v1(111.15,45.96) 111.15,45.45 ; v1(81.03,28.6) 81.03,29.11 ; v1(81.03,28.6) 80.52,28.6 ; v1(81.03,28.6) 81.03,28.1 ; C65.1 106.93,28.14 ; C65.1 v1(104.27,28.14) ; C65.1 105.81,27.54 ; 92.94,27.99 U11.4 ; U11.4 91.91,28.54 ; U11.4 92.94,29.09 ; v1(93.74,42.21) 94.25,42.21 ; v1(93.74,42.21) 93.23,42.21 ; v1(93.74,42.21) 93.74,41.7 ; v1(93.74,42.21) 93.74,42.72 ; v1(71.52,27.05) 69.93,25.46 69.54,25.46 69.41,25.33 C15.2 ; v1(71.52,27.05) 71.52,26.54 ; v1(71.52,27.05) 72.03,27.05 ; v1(71.52,27.05) 71.01,27.05 ; v1(71.52,27.05) 71.52,27.56 ; U4.22 21.03,32.97 21.31,33.25 23.81,33.25 C30.1 ; 87.17,35.66 C6.2 ; C6.2 87.9,36.13 ; C6.2 86.44,36.13 ; 107.97,26.2 C64.2 ; C64.2 108.7,26.67 ; C64.2 107.97,27.14 ; C64.2 v1(107.02,26.67) ; 42.52,3.47 v1(42.52,3.98) ; v1(42.52,3.98) 42.52,4.49 ; v1(42.52,3.98) 43.03,3.98 ; 109.24,19.76 v1(109.75,19.76) ; v1(109.75,19.76) 109.75,20.27 ; v1(109.75,19.76) 110.26,19.76 ; 45.64,11.13 v1(46.15,11.13) ; v1(46.15,11.13) 46.15,10.62 ; v1(46.15,11.13) 46.15,11.63 ; v1(46.15,11.13) 46.66,11.13 ; U6.11 81.7,47.31 78.71,44.32 ; U6.11 80.55,49.29 ; U6.11 82.86,49.29 ; 101.94,45.43 v1(101.94,45.93) ; v1(101.94,45.93) 101.43,45.93 ; v1(101.94,45.93) 101.94,46.44 ; v1(101.94,45.93) 102.45,45.93 ; 122.5,5 M2.1 ; M2.1 125,2.5 ; M2.1 127.5,5 ; M2.1 125,7.5 ; 70.06,56.79 v1(70.57,56.79) ; v1(70.57,56.79) 71.08,56.79 ; v1(70.57,56.79) 70.57,56.28 ; v1(70.57,56.79) 70.57,57.3 ; 82.71,11.23 R35.2 ; R35.2 82.24,11.95 ; R35.2 82.71,12.68 ; v1(63.71,7.05) 63.71,7.56 ; v1(63.71,7.05) 63.2,7.05 ; v1(63.71,7.05) 63.71,6.54 ; v1(63.71,7.05) 64.22,7.05 ; C23.1 83.13,18.27 ; C23.1 83.13,16.81 ; C23.1 82.66,17.54 ; 74.16,18.94 v1(74.16,19.45) 74.67,19.45 ; 2.5,55 M3.1 ; M3.1 5,52.5 ; M3.1 5,57.5 ; M3.1 7.5,55 ; v1(69.76,18.96) 69.76,19.47 ; v1(69.76,18.96) 70.27,18.96 ; v1(69.76,18.96) 69.76,18.45 ; v1(69.76,18.96) 69.25,18.96 ; v1(81.09,30.78) 81.09,31.28 ; v1(81.09,30.78) 81.09,30.27 ; v1(81.09,30.78) 81.6,30.78 ; v1(81.09,30.78) 80.58,30.78 ; 6.92,35.75 v1(6.92,35.24) 6.92,34.73 ; U15.2 v1(120.76,18.14) ; U15.2 119.02,18.14 ; U15.2 119.56,19.09 ; U15.2 119.56,17.18 ; v1(120.76,18.14) 121.26,18.14 ; v1(120.76,18.14) 120.76,17.63 ; v1(120.76,18.14) 120.76,18.65 ; v1(52.45,12.01) 52.96,12.01 ; v1(52.45,12.01) 51.94,12.01 ; v1(52.45,12.01) 52.45,11.5 ; v1(52.45,12.01) 52.45,12.51 ; C24.1 89.03,18.01 ; C24.1 88.56,17.28 ; C24.1 89.03,16.55 ; v1(110.94,19.72) 111.45,19.72 ; v1(110.94,19.72) 110.43,19.72 ; v1(110.94,19.72) 110.94,19.21 ; v1(37.25,39.45) 37.25,39.96 ; v1(37.25,39.45) 37.25,38.94 ; v1(37.25,39.45) 36.74,39.45 ; v1(37.25,39.45) 37.76,39.45 ; 6.92,26.97 v1(6.92,27.47) 6.92,27.98 ; v1(70.49,40.11) 71,40.11 ; v1(70.49,40.11) 69.98,40.11 ; v1(70.49,40.11) 70.49,40.62 ; v1(70.49,40.11) 70.49,39.6 ; 59.67,35.06 v1(59.67,35.57) ; v1(59.67,35.57) 60.18,35.57 ; v1(59.67,35.57) 59.16,35.57 ; v1(50.63,45.07) 51.14,45.07 ; v1(50.63,45.07) 50.63,45.58 ; v1(50.63,45.07) 50.63,44.56 ; v1(50.63,45.07) 50.12,45.07 ; 85.6,35.67 C73.2 ; C73.2 86.33,36.14 ; C73.2 84.87,36.14 ; 11.61,12.81 v1(11.61,13.32) ; v1(11.61,13.32) 12.12,13.32 ; v1(11.61,13.32) 11.1,13.32 ; M4.1 125,57.5 ; M4.1 122.5,55 ; M4.1 127.5,55 ; M4.1 125,52.5 ; 90.17,19.07 v1(89.67,19.07) 89.67,18.57 ; 77.6,28.1 v1(77.6,28.6) ; v1(77.6,28.6) 77.6,29.11 ; v1(77.6,28.6) 77.09,28.6 ; 54.86,11.69 v1(55.37,11.69) 55.37,12.2 ; R50.2 116.62,31.07 ; R50.2 115.89,30.61 ; R50.2 115.89,31.54 ; R50.2 115.16,31.07 ; 27.68,6.93 v1(28.19,6.93) ; v1(28.19,6.93) 28.7,6.93 ; v1(28.19,6.93) 28.19,6.43 ; v1(28.19,6.93) 28.19,7.44 ; C36.1 8.11,36.79 ; C36.1 7.64,37.52 ; C36.1 7.64,36.06 ; v1(116.01,29.33) 116.01,29.84 ; v1(116.01,29.33) 116.52,29.33 ; v1(116.01,29.33) 115.5,29.33 ; v1(116.01,29.33) 116.01,28.82 ; R5.1 18.67,25.08 ; R5.1 v1(18.21,24.02) ; R5.1 17.74,25.08 ; R5.1 18.21,25.81 ; v1(73.31,48.66) 73.82,48.66 ; v1(73.31,48.66) 73.31,48.15 ; v1(73.31,48.66) 73.31,49.17 ; v1(73.31,48.66) 72.8,48.66 ; v1(63.8,21.19) 63.8,21.69 ; v1(63.8,21.19) 64.3,21.19 ; v1(63.8,21.19) 63.8,20.68 ; v1(63.8,21.19) 63.29,21.19 ; 57.96,29.12 v1(57.96,29.63) ; v1(57.96,29.63) 58.47,29.63 ; v1(57.96,29.63) 57.96,30.14 ; v1(57.96,29.63) 57.45,29.63 ; C81.1 74.23,42 ; C81.1 74.23,42.94 ; C81.1 75.53,42.47 75.92,42.86 C78.2 ; U14.7 118.32,14.7 ; U14.7 119.35,14.15 ; U14.7 118.32,13.59 ; 77.37,23.67 v1(77.87,23.67) 78.38,23.67 ; 92.94,26.72 U11.3 ; U11.3 92.94,27.82 ; U11.3 91.91,27.27 ; v1(103.76,29.96) 103.76,30.47 ; v1(103.76,29.96) 104.26,29.96 ; v1(103.76,29.96) 103.25,29.96 ; v1(103.76,29.96) 103.76,29.45 ; 88.21,36.48 C7.2 ; C7.2 89.16,35.94 ; C7.2 90.12,36.48 ; 118.91,38.78 v1(119.42,38.78) ; v1(119.42,38.78) 119.42,39.29 ; v1(119.42,38.78) 119.42,38.27 ; v1(119.42,38.78) 119.93,38.78 ; 31.47,39.34 v1(31.98,39.34) ; v1(31.98,39.34) 32.49,39.34 ; v1(31.98,39.34) 31.98,39.85 ; 107.03,14.92 v1(107.03,15.43) ; v1(107.03,15.43) 106.52,15.43 ; v1(107.03,15.43) 107.03,15.94 ; v1(107.03,15.43) C71.2 ; 41,41.17 U8.1 ; U8.1 42,40.16 ; U8.1 43,41.17 ; U8.1 42,42.17 ; O1.2 69.87,30.99 ; O1.2 69.87,29.09 ; O1.2 69.06,30.04 ; 18.9,27.43 C72.2 ; C72.2 19.63,26.97 ; C72.2 20.36,27.43 ; C72.2 19.63,27.9 ; R16.2 92.92,18.65 ; R16.2 92.45,17.92 ; R16.2 92.45,19.38 ; v1(90.32,14.51) 90.82,14.51 ; v1(90.32,14.51) 90.32,15.02 ; v1(90.32,14.51) 89.81,14.51 ; 1.79,19.34 v1(2.3,19.34) ; v1(2.3,19.34) 2.3,18.83 ; v1(2.3,19.34) 2.3,19.85 ; v1(2.3,19.34) 2.81,19.34 ; v1(12.64,22.36) 12.64,22.86 ; v1(12.64,22.36) 13.15,22.36 ; v1(12.64,22.36) 12.13,22.36 ; v1(12.64,22.36) 12.64,21.85 ; U10.1 101.35,40.42 ; U10.1 99.34,40.42 ; U10.1 100.34,39.42 ; 78.71,44.32 77.26,42.86 C78.2 ; 78.71,44.32 C79.2 ; 51.06,48.12 U7.12 ; U7.12 49.91,49.28 ; U7.12 51.06,50.43 ; U7.12 52.21,49.28 ; 45.49,22.07 v1(46,22.07) ; v1(46,22.07) 46,21.56 ; v1(46,22.07) 46,22.58 ; v1(46,22.07) 46.51,22.07 ; C80.2 C79.2 ; C80.2 72.18,44.3 U16.1 ; C80.2 71.47,44.32 ; C80.2 72.2,44.78 ; C80.2 72.2,43.85 ; C79.2 74.23,43.85 ; C79.2 74.23,44.78 ; 23.06,11.64 C52.2 23.06,10.71 ; 90.78,13.64 C49.1 90.32,12.91 ; 128.65,24.65 v1(128.65,25.16) ; v1(128.65,25.16) 128.14,25.16 ; v1(128.65,25.16) 128.65,25.67 ; v1(128.65,25.16) 129.16,25.16 ; 35.73,33.2 C13.1 ; C13.1 36.46,33.67 ; C13.1 36.46,32.74 ; C13.1 37.19,33.2 ; v1(83.94,17.54) 83.94,18.05 ; v1(83.94,17.54) 84.45,17.54 ; v1(83.94,17.54) 83.94,17.03 ; 53.83,48.12 U7.13 ; U7.13 52.68,49.28 ; U7.13 53.83,50.43 ; U7.13 54.98,49.28 ; 107.97,27.15 R47.2 ; R47.2 107.97,28.08 ; R47.2 107.12,27.61 v1(107.08,27.65) ; 51.92,58.47 v1(52.43,58.47) ; v1(52.43,58.47) 52.43,57.96 ; v1(52.43,58.47) 52.94,58.47 ; v1(52.43,58.47) 52.43,58.97 ; 92.94,25.45 U11.2 ; U11.2 91.91,26 ; U11.2 92.94,26.55 ; 56.19,12.42 C14.1 56.66,11.69 ; 104.38,18 v1(104.38,18.5) ; v1(104.38,18.5) 104.89,18.5 ; v1(104.38,18.5) 103.87,18.5 ; v1(104.38,18.5) 104.38,19.01 ; 89.45,14.15 v1(89.45,13.64) 89.45,13.13 ; v1(20.52,23.99) 20.52,24.5 ; v1(20.52,23.99) 20.52,23.49 ; v1(20.52,23.99) 21.02,23.99 ; 18.01,26.97 C1.2 ; C1.2 18.01,27.9 ; C1.2 18.74,27.43 ; C1.2 17.28,27.43 ; v1(5.14,40.87) 5.14,41.38 ; v1(5.14,40.87) 4.63,40.87 ; v1(5.14,40.87) 5.14,40.37 ; 62.42,11.69 C27.1 61.95,12.42 ; v1(98.38,13.64) 98.89,13.64 ; v1(98.38,13.64) 98.38,13.13 ; v1(98.38,13.64) 98.38,14.15 ; 64.83,12.42 C28.1 65.3,11.69 ; 77.79,19.26 C22.1 78.26,19.98 ; v1(45.78,35.3) 46.29,35.3 ; v1(45.78,35.3) 45.27,35.3 ; v1(45.78,35.3) 45.78,35.8 ; C8.2 v1(82.68,38.51) ; C8.2 81.82,37.79 ; C8.2 81.36,38.51 ; C8.2 81.82,39.24 ; v1(82.68,38.51) 82.68,39.02 ; v1(82.68,38.51) 83.19,38.51 ; v1(82.68,38.51) 82.68,38.01 ; v1(61.15,37.58) 61.66,37.58 ; v1(61.15,37.58) 61.15,38.08 ; v1(61.15,37.58) 61.15,37.07 ; U7.11 49.44,49.28 ; U7.11 48.29,48.12 ; U7.11 47.14,49.28 ; U7.11 48.29,50.43 ; C78.2 76.52,42.27 ; C78.2 76.52,43.45 ; 6.92,23.86 v1(6.92,24.37) 6.92,24.88 ; 64.14,12.2 v1(64.14,11.69) 64.14,11.18 ; v1(101.4,11.26) 101.91,11.26 ; v1(101.4,11.26) 100.89,11.26 ; v1(101.4,11.26) 101.4,11.77 ; v1(101.4,11.26) 101.4,10.76 ; 91.72,21.75 v1(91.72,22.26) 91.72,22.77 ; 73.77,16.7 v1(73.26,16.7) 72.75,16.7 ; v1(21.68,36.73) 22.19,36.73 ; v1(21.68,36.73) 21.68,36.22 ; v1(21.68,36.73) 21.17,36.73 ; v1(21.68,36.73) U4.2 ; 80.32,50.67 U6.24 79.17,51.83 ; 118.32,12.32 U14.6 ; U14.6 118.32,13.43 ; U14.6 119.35,12.88 ; 86.47,40.38 v1(86.98,40.38) ; v1(86.98,40.38) 86.98,40.89 ; v1(86.98,40.38) 86.98,39.87 ; v1(86.98,40.38) 87.49,40.38 ; 72.84,23.24 R18.1 73.31,22.51 ; R48.1 118.59,20.86 v1(118.18,21.28) ; R48.1 118.96,21.59 ; R48.1 119.43,20.86 ; 106.52,26.67 v1(107.02,26.67) ; v1(107.02,26.67) 107.02,26.16 ; v1(37.58,16.23) 38.09,16.23 ; v1(37.58,16.23) 37.58,15.72 ; v1(37.58,16.23) 37.07,16.23 ; v1(37.58,16.23) 37.58,16.74 ; 23.86,32.74 C30.1 ; C30.1 23.86,33.67 ; C30.1 23.13,33.21 ; v1(2.79,39.45) 3.3,39.45 ; v1(2.79,39.45) 2.79,39.96 ; v1(2.79,39.45) 2.79,38.94 ; v1(2.79,39.45) 2.28,39.45 ; 89.47,11.07 v1(89.47,11.57) ; v1(89.47,11.57) 88.96,11.57 ; v1(89.47,11.57) 89.47,12.08 ; 89.8,21.37 v1(89.8,20.86) 90.31,20.86 ; 30.92,13.04 v1(30.92,12.53) 30.92,12.02 ; D1.2 v1(97.34,34.3) ; D1.2 97.34,36.71 ; D1.2 96.28,35.66 ; D1.2 98.39,35.66 ; v1(97.34,34.3) 97.34,33.8 ; v1(97.34,34.3) 96.83,34.3 ; v1(39.81,39.46) 40.32,39.46 ; v1(39.81,39.46) 39.81,38.96 ; v1(39.81,39.46) 39.81,39.97 ; v1(39.81,39.46) 39.3,39.46 ; 82.75,22.96 C12.2 83.68,22.96 ; R58.2 84.31,12.68 ; R58.2 84.78,11.95 ; R58.2 84.31,11.23 ; v1(105.73,30.55) 106.24,30.55 ; v1(105.73,30.55) 105.22,30.55 ; v1(105.73,30.55) 105.73,30.04 ; v1(105.73,30.55) R51.1 ; R41.2 90.32,12.68 ; R41.2 90.32,11.23 ; R41.2 90.78,11.95 ; 27.28,25.71 U1.6 ; U1.6 v1(26.09,26.26) ; U1.6 27.28,26.82 ; U1.6 v1(28.49,26.26) ; 45.52,48.12 U7.10 ; U7.10 46.67,49.28 ; U7.10 45.52,50.43 ; U7.10 44.37,49.28 ; v1(120.72,4.52) 120.72,5.03 ; v1(120.72,4.52) 121.23,4.52 ; v1(120.72,4.52) 120.72,4.01 ; v1(120.72,4.52) 120.21,4.52 ; 60.67,24.9 v1(60.67,25.41) ; v1(60.67,25.41) 60.16,25.41 ; v1(60.67,25.41) 60.67,25.91 ; 86.51,26 U11.7 ; U11.7 87.54,25.45 ; U11.7 87.54,26.55 ; 14.72,37.83 U4.12 15.18,36.93 ; U7.15 25.9,51.82 ; U7.15 24.74,52.97 ; U7.15 23.59,51.82 ; 13.69,48.04 U7.27 ; U7.27 16.19,50.55 ; U7.27 11.19,50.55 ; U7.27 13.69,53.05 ; v1(59.87,43.3) 59.87,43.81 ; v1(59.87,43.3) 59.87,42.79 ; v1(59.87,43.3) 60.38,43.3 ; v1(59.87,43.3) 59.37,43.3 ; 105.19,4.19 H11.3 108.2,4.19 ; 94.05,33.38 v1(94.56,33.38) ; v1(94.56,33.38) 94.56,32.87 ; v1(94.56,33.38) 94.56,33.89 ; v1(94.56,33.38) 95.07,33.38 ; 22.6,19.53 C35.1 23.07,18.8 ; 30.84,20.68 v1(31.35,20.68) ; v1(31.35,20.68) 31.35,21.19 ; v1(31.35,20.68) 31.86,20.68 ; v1(31.35,20.68) 31.35,20.17 ; v1(59.17,20.4) 59.17,20.91 ; v1(59.17,20.4) 59.17,19.89 ; v1(59.17,20.4) 59.68,20.4 ; v1(59.17,20.4) 58.67,20.4 ; v1(50.88,26.72) 51.39,26.72 ; v1(50.88,26.72) 50.88,26.21 ; v1(50.88,26.72) 50.88,27.23 ; v1(50.88,26.72) 50.37,26.72 ; 67.03,11.18 v1(67.03,11.69) 67.03,12.2 ; 18.49,7.11 v1(19,7.11) ; v1(19,7.11) 19,6.6 ; v1(19,7.11) 19,7.62 ; v1(19,7.11) 19.5,7.11 ; v1(87.17,37.54) 87.17,38.05 ; v1(87.17,37.54) 86.67,37.54 ; v1(87.17,37.54) 87.68,37.54 ; 110.2,30.27 v1(110.71,30.27) ; v1(110.71,30.27) 111.22,30.27 ; v1(110.71,30.27) 110.71,29.76 ; 55.8,30.6 v1(55.8,31.11) ; v1(55.8,31.11) 56.31,31.11 ; v1(55.8,31.11) 55.8,31.61 ; v1(55.8,31.11) 55.29,31.11 ; R59.2 93.32,12.68 ; R59.2 93.79,11.95 ; R59.2 93.32,11.23 ; 6.92,26.43 v1(6.92,25.92) 6.92,25.41 ; 7.64,34.51 R32.2 ; R32.2 7.64,35.97 ; R32.2 8.11,35.24 ; v1(73.08,26.13) 73.59,26.13 ; v1(73.08,26.13) 73.08,25.62 ; v1(73.08,26.13) 72.58,26.13 ; v1(73.08,26.13) 73.08,26.64 ; 2.29,46.59 v1(2.8,46.59) ; v1(2.8,46.59) 3.31,46.59 ; v1(2.8,46.59) 2.8,47.1 ; v1(2.8,46.59) 2.8,46.08 ; 88.77,26.51 v1(88.77,26) 88.77,25.49 ; U4.13 15.18,33.01 ; U4.13 15.18,31.29 v1(14.73,30.84) ; U4.13 14.72,32.11 ; 6.92,33.18 v1(6.92,33.69) 6.92,34.2 ; 30.82,29.8 v1(31.33,29.8) ; v1(31.33,29.8) 31.84,29.8 ; v1(31.33,29.8) 31.33,29.29 ; v1(74.1,14.64) 74.1,15.15 ; v1(74.1,14.64) 74.61,14.64 ; v1(74.1,14.64) 73.59,14.64 ; v1(14.73,30.84) 15.24,30.84 ; v1(14.73,30.84) 14.73,30.33 ; v1(14.73,30.84) 14.73,31.35 ; v1(14.73,30.84) 14.22,30.84 ; 51.88,21.54 v1(52.39,21.54) ; v1(52.39,21.54) 52.39,22.04 ; v1(52.39,21.54) 52.39,21.03 ; v1(52.39,21.54) 52.89,21.54 ; 106.94,17.78 v1(106.94,18.29) ; v1(106.94,18.29) 106.43,18.29 ; v1(106.94,18.29) C68.2 ; v1(106.94,18.29) 106.94,18.8 ; 85.43,20.78 v1(85.43,21.29) ; v1(85.43,21.29) 85.94,21.29 ; v1(85.43,21.29) 85.43,21.8 ; 84.31,12.91 C43.1 84.78,13.64 ; 113.41,25.24 U13.7 ; U13.7 114.44,25.79 ; U13.7 114.44,24.68 ; 8.57,22.81 C46.2 9.04,22.09 ; C42.1 82.71,14.37 ; C42.1 82.71,12.91 ; C42.1 82.24,13.64 ; v1(73.95,23.24) 74.46,23.24 ; v1(73.95,23.24) 73.95,22.73 ; v1(73.95,23.24) 73.95,23.75 ; v1(93.6,6.87) 94.1,6.87 ; v1(93.6,6.87) 93.09,6.87 ; v1(93.6,6.87) 93.6,7.38 ; v1(93.6,6.87) 93.6,6.36 ; v1(36.58,46.77) 37.09,46.77 ; v1(36.58,46.77) 36.58,47.28 ; v1(36.58,46.77) 36.58,46.27 ; v1(36.58,46.77) 36.07,46.77 ; 81.32,43.23 v1(81.83,43.23) ; v1(81.83,43.23) 82.34,43.23 ; v1(81.83,43.23) 81.83,43.74 ; v1(81.83,43.23) 81.83,42.72 ; 83.73,23.93 v1(83.22,23.93) 82.71,23.93 ; v1(96.59,6.44) 96.59,6.95 ; v1(96.59,6.44) 96.59,5.93 ; v1(96.59,6.44) 96.08,6.44 ; v1(96.59,6.44) 97.1,6.44 ; C2.2 16.18,27.62 ; C2.2 17.14,27.08 ; C2.2 15.23,27.08 ; C2.2 16.18,26.54 ; C3.1 15.38,25.81 ; C3.1 15.84,25.08 ; C3.1 15.38,24.35 ; C5.2 79.26,38.54 ; C5.2 78.79,39.27 ; C5.2 78.32,38.54 ; 81.95,27.88 C10.1 ; C10.1 81.95,29.33 ; C10.1 82.41,28.6 ; 12.71,31.92 v1(13.22,31.92) ; v1(13.22,31.92) 13.72,31.92 ; v1(13.22,31.92) 13.22,32.43 ; v1(13.22,31.92) 13.22,31.41 ; 61.19,15.97 v1(61.7,15.97) ; v1(61.7,15.97) 61.7,16.47 ; v1(61.7,15.97) 62.21,15.97 ; v1(61.7,15.97) 61.7,15.46 ; R34.2 73.73,12.68 ; R34.2 73.26,11.95 ; R34.2 73.73,11.23 ; v1(21.79,4.92) 22.3,4.92 ; v1(21.79,4.92) 21.79,5.43 ; v1(21.79,4.92) 21.79,4.41 ; v1(21.79,4.92) 21.28,4.92 ; 109.57,26.19 C61.2 ; C61.2 v1(110.53,26.66) ; C61.2 108.84,26.66 ; 77.89,9.06 v1(77.89,9.57) ; v1(77.89,9.57) 77.89,10.08 ; v1(77.89,9.57) 77.38,9.57 ; v1(77.89,9.57) 78.4,9.57 ; 78.49,27.88 C9.1 ; C9.1 78.49,29.33 ; C9.1 78.95,28.6 ; R51.1 105.73,31.71 ; R51.1 105,31.24 ; R51.1 106.46,31.24 ; v1(56.4,45.95) 56.4,46.46 ; v1(56.4,45.95) 56.4,45.45 ; v1(56.4,45.95) 55.89,45.95 ; v1(56.4,45.95) 56.9,45.95 ; 75.09,31.56 v1(75.6,31.56) ; v1(75.6,31.56) 76.11,31.56 ; v1(75.6,31.56) 75.6,32.07 ; 35.89,35.65 v1(36.4,35.65) 36.91,35.65 ; C39.1 7.64,26.65 ; C39.1 7.64,25.19 ; C39.1 8.11,25.92 ; 92.45,21.53 C56.1 92.92,22.26 ; 34.4,34.14 C31.1 33.67,34.6 ; 113.21,30.58 U12.5 113.21,31.69 ; 8.11,24.37 R56.2 7.64,25.1 ; 63.44,27.02 v1(63.95,27.02) ; v1(63.95,27.02) 63.95,26.51 ; v1(63.95,27.02) 64.46,27.02 ; v1(63.95,27.02) 63.95,27.53 ; 67.87,28.49 O1.4 68.67,27.54 ; 114.44,25.95 U13.6 114.44,27.06 ; 105.02,49.29 U6.3 103.86,48.13 ; C83.1 6.59,40.87 ; C83.1 6.05,39.92 ; C83.1 6.05,41.83 ; C47.2 79.71,14.37 ; C47.2 79.71,12.91 ; C47.2 79.24,13.64 ; C69.2 112.76,18.79 ; C69.2 113.22,18.06 ; C69.2 112.29,18.06 ; 97.72,12.91 C55.2 ; C55.2 97.25,13.64 ; C55.2 97.72,14.37 ; U6.26 118.81,50.56 ; U6.26 113.8,50.56 ; U6.26 116.3,48.05 ; U6.26 116.3,53.06 ; 83.8,14.83 v1(84.31,14.83) 84.82,14.83 ; C68.2 107.87,17.33 ; C68.2 108.41,18.29 ; 73.24,13.64 C40.1 73.7,12.91 ; v1(110.53,26.66) 110.53,26.15 ; v1(110.53,26.66) 110.53,27.17 ; v1(110.53,26.66) 111.04,26.66 ; 84.24,51.83 U6.23 83.09,50.67 ; 86.76,30.68 v1(87.27,30.68) ; v1(87.27,30.68) R12.1 ; v1(87.27,30.68) 87.77,30.68 ; v1(87.27,30.68) 87.27,30.17 ; 35.05,41.55 R43.2 35.77,42.02 ; 111.81,26.79 C60.2 ; C60.2 112.66,27.95 ; C60.2 110.65,27.95 v1(110.62,27.91) ; v1(28.49,26.26) 28.49,26.77 ; v1(28.49,26.26) 28.49,25.76 ; R12.1 87.73,31.7 ; R12.1 86.8,31.7 ; v1(92.98,9.36) 93.49,9.36 ; v1(92.98,9.36) 92.48,9.36 ; v1(92.98,9.36) 92.98,9.86 ; v1(92.98,9.36) 92.98,8.85 ; C75.1 75.33,37.06 ; C75.1 74.86,36.33 ; C75.1 75.33,35.6 ; C75.1 75.8,36.33 ; C84.1 6.88,47.11 ; C84.1 6.41,46.38 ; C84.1 5.95,47.11 ; C84.1 6.41,47.84 ; 5,2.5 M1.1 ; M1.1 5,7.5 ; M1.1 2.5,5 ; M1.1 7.5,5 ; U1.4 22.91,24.99 ; U1.4 21.88,24.44 ; U1.4 21.88,25.55 ; 14.5,24.57 v1(14.5,25.08) ; v1(14.5,25.08) 14.5,25.59 ; v1(14.5,25.08) 14,25.08 ; v1(37.4,6.81) 37.9,6.81 ; v1(37.4,6.81) 36.89,6.81 ; v1(37.4,6.81) 37.4,6.3 ; v1(37.4,6.81) 37.4,7.31 ; 8.11,29.03 C38.1 7.64,28.3 ; 81.61,8.87 v1(81.61,9.38) ; v1(81.61,9.38) 81.1,9.38 ; v1(81.61,9.38) 82.12,9.38 ; v1(81.61,9.38) 81.61,9.88 ; 7.64,32.86 R55.2 8.11,32.13 ; 76.71,11.23 R57.2 ; R57.2 76.71,12.68 ; R57.2 76.24,11.95 ; 31.09,17.93 Q2.2 30.33,18.48 ; C70.2 108.01,13.34 ; C70.2 107.55,12.62 ; C70.2 108.48,12.62 ; 32.83,14.99 v1(32.33,14.99) 31.82,14.99 ; v1(89.6,31.31) 89.6,31.81 ; v1(89.6,31.31) 89.6,30.8 ; v1(89.6,31.31) 89.09,31.31 ; v1(89.6,31.31) 90.11,31.31 ; 83.51,12.23 v1(83.51,11.72) 83.51,11.21 ; U7.26 63.23,50.55 ; U7.26 60.73,53.05 ; U7.26 58.23,50.55 ; U7.26 60.73,48.04 ; 94.13,26.76 v1(94.13,27.27) 94.13,27.78 ; 25.48,36.93 U5.12 25.03,37.83 ; v1(99.04,17.49) 99.55,17.49 ; v1(99.04,17.49) 99.04,17.99 ; v1(99.04,17.49) 98.54,17.49 ; v1(99.04,17.49) 99.04,16.98 ; v1(71.15,29.91) 71.66,29.91 ; v1(71.15,29.91) 71.15,29.4 ; v1(71.15,29.91) 71.15,30.41 ; 37.13,36.29 C57.1 36.4,36.76 ; 114.39,38.11 v1(114.9,38.11) ; v1(114.9,38.11) 114.9,38.62 ; v1(114.9,38.11) 115.4,38.11 ; v1(114.9,38.11) 114.9,37.61 ; 88.56,19.07 R19.1 89.03,18.34 ; 39.53,17.5 v1(39.53,18.01) ; v1(39.53,18.01) 39.02,18.01 ; v1(39.53,18.01) 39.53,18.52 ; 94.17,29.05 v1(94.17,28.54) 94.17,28.03 ; 84.92,6.6 v1(84.92,7.11) ; v1(84.92,7.11) 84.92,7.62 ; v1(84.92,7.11) 84.42,7.11 ; v1(84.92,7.11) 85.43,7.11 ; 21.59,19.99 v1(21.59,20.5) 21.59,21.01 ; 52.66,16.81 v1(53.17,16.81) 53.68,16.81 ; 47.66,16.8 v1(48.17,16.8) 48.68,16.8 ; 34.5,25.72 v1(35.01,25.72) ; v1(35.01,25.72) 35.52,25.72 ; v1(35.01,25.72) 35.01,26.23 ; v1(35.01,25.72) 35.01,25.21 ; 69.38,31.16 v1(69.38,31.67) ; v1(69.38,31.67) 69.89,31.67 ; v1(69.38,31.67) 69.38,32.17 ; 92.63,14.15 v1(92.63,13.64) 92.63,13.13 ; 48.4,38.88 v1(48.4,38.37) 47.89,38.37 ; 67.71,6.61 v1(68.22,6.61) ; v1(68.22,6.61) 68.72,6.61 ; v1(68.22,6.61) 68.22,7.12 ; v1(68.22,6.61) 68.22,6.1 ; 97.42,22.5 J1.4 ; J1.4 99.42,22.5 ; J1.4 98.42,23.51 ; J1.4 98.42,21.5 ; C76.1 75.67,39.07 ; C76.1 75.13,38.12 ; C76.1 75.67,37.17 ; v1(104.27,28.14) 104.27,27.63 ; v1(104.27,28.14) 103.76,28.14 ; v1(104.27,28.14) 104.27,28.64 ; 77.28,14.21 v1(77.28,14.72) ; v1(77.28,14.72) 76.77,14.72 ; v1(77.28,14.72) 77.79,14.72 ; R33.2 7.64,28.2 ; R33.2 7.64,26.75 ; R33.2 8.11,27.47 ; 76.24,13.64 C41.1 ; C41.1 76.71,12.91 ; C41.1 77.17,13.64 ; C58.1 97.53,38.53 ; C58.1 96.8,38.07 ; C58.1 96.8,39 ; C58.1 96.07,38.53 ; C62.2 120.13,30.63 ; C62.2 117.32,30.63 ; C62.2 118.73,29.23 ; v1(68.57,21.03) 68.57,21.54 ; v1(68.57,21.03) 68.06,21.03 ; v1(68.57,21.03) 69.08,21.03 ; 112.92,13.43 U14.3 112.92,12.32 ; C16.1 68.74,33.02 ; C16.1 69.2,32.3 ; C16.1 68.27,32.3 ; 60.9,32 v1(60.9,32.51) ; v1(60.9,32.51) 60.4,32.51 ; v1(60.9,32.51) 60.9,33.02 ; 74.04,21.87 v1(74.04,21.37) 74.55,21.37 ; C71.2 107.87,16.38 ; C71.2 108.41,15.43 ; C71.2 107.87,14.48 ; 15.83,36.39 v1(15.83,36.9) 15.32,36.9 ; 112.09,20.93 C66.2 109.78,20.93 ; 85.09,37.5 v1(85.6,37.5) ; v1(85.6,37.5) 85.6,38.01 ; v1(85.6,37.5) 86.11,37.5 ; 79.01,19.76 v1(79.01,19.26) 79.52,19.26 ; v1(25.16,30.71) 25.16,31.21 ; v1(25.16,30.71) 24.65,30.71 ; v1(25.16,30.71) 25.16,30.2 ; v1(26.09,26.26) 26.09,25.76 ; v1(26.09,26.26) 26.09,26.77 ; v1(26.09,26.26) 25.58,26.26 ; 76.51,38.63 v1(76.51,38.12) 76.51,37.61 ; U6.27 71.77,50.56 ; U6.27 69.26,53.06 ; U6.27 66.76,50.56 ; U6.27 69.26,48.05 ; 63.38,35.77 v1(63.38,36.28) ; v1(63.38,36.28) 63.38,36.79 ; v1(63.38,36.28) 63.89,36.28 ; v1(63.38,36.28) 62.87,36.28 ; v1(16.23,17.19) 16.74,17.19 ; v1(16.23,17.19) 16.23,17.69 ; v1(16.23,17.19) 16.23,16.68 ; v1(16.23,17.19) 15.73,17.19 ; 72.79,21.37 C19.1 73.26,22.09 ; 23.07,20.5 C34.1 22.6,19.77 ; 22.28,10.19 v1(22.28,10.69) 22.79,10.69 ; C37.1 8.11,33.69 ; C37.1 7.64,34.42 ; C37.1 7.64,32.96 ; 44.99,43.02 v1(44.99,43.53) ; v1(44.99,43.53) 44.99,44.04 ; v1(44.99,43.53) 45.5,43.53 ; v1(44.99,43.53) 44.48,43.53 ; 77.79,22.69 C17.1 78.73,22.69 ; 92.94,24.18 U11.1 92.94,25.28 ; C48.2 88.71,14.37 ; C48.2 88.25,13.64 ; C48.2 88.71,12.91 ; C50.1 93.79,13.64 ; C50.1 93.32,14.37 ; C50.1 93.32,12.91 ; 13.25,10.36 v1(13.76,10.36) ; v1(13.76,10.36) 13.76,10.87 ; v1(13.76,10.36) 13.76,9.86 ; v1(13.76,10.36) 14.27,10.36 ; v1(94.05,24.73) 94.05,25.24 ; v1(94.05,24.73) 94.05,24.22 ; v1(94.05,24.73) 94.55,24.73 ; 24.97,39.06 v1(25.48,39.06) 25.48,39.57 ; 102.48,52.98 U6.16 101.33,51.83 ; C4.1 v1(20.67,22.77) ; C4.1 19.61,22.04 ; C4.1 19.14,22.77 ; v1(66.68,27.54) 66.68,28.05 ; v1(66.68,27.54) 66.68,27.03 ; v1(66.68,27.54) 66.17,27.54 ; 6.92,32.64 v1(6.92,32.13) 6.92,31.63 ; v1(89.16,37.68) 89.67,37.68 ; v1(89.16,37.68) 88.66,37.68 ; v1(89.16,37.68) 89.16,38.18 ; 75.48,32.91 R9.2 74.55,32.91 ; 32.2,21.27 Q1.2 ; Q1.2 31.64,22.03 ; Q1.2 32.2,22.78 ; Q1.2 32.75,22.03 ; 119.84,27.06 U13.3 119.84,25.95 ; 80.31,14.29 v1(80.31,13.78) 80.31,13.28 ; 83.45,14.44 v1(83.45,13.93) 83.45,13.42 ; 21.27,16.73 v1(21.78,16.73) ; v1(21.78,16.73) 21.78,17.24 ; v1(21.78,16.73) 21.78,16.23 ; 21.84,19.46 v1(21.84,18.95) 21.34,18.95 ; 68.18,11.69 C29.1 67.71,10.96 ; 22.6,16.37 R54.2 23.07,17.1
  TOP w0.508: U17.2 6.85,46.67 C84.1 6.35,47.17 6.35,49.51 11.5,54.66 78.09,54.66 80.32,52.43 U6.24 ; U12.9 v1(110.71,30.27)
  TOP w0.635: U6.24 83.77,55.27 86.51,55.27 ; U6.24 81.7,50.44 U6.11 ; U6.24 U6.23 83.09,51.85 86.51,55.27 ; 116.51,12.88 117.78,14.15 U14.7 ; 116.51,12.88 U14.6 ; 116.51,12.88 U14.3 111.9,12.88 110.92,11.9 110.92,9.65 110.68,9.41 ; C66.2 v1(110.94,19.72) ; 86.51,55.27 124.73,55.27 M4.1 ; 123.38,24.91 121.78,26.51 U13.3 117.55,26.51 ; C62.2 118.23,31.13 115.95,31.13 115.95,31.14 U12.5 112.47,31.14 111.47,32.13 111.47,32.64 111.07,33.04 U12.9 ; U13.6 117.55,26.51 ; 117.55,26.51 116.28,25.24 U13.7 ; M1.1 8.97,1.03 104.02,1.03 106.7,3.71 H11.3
  TOP w0.889: M2.1 121.85,1.85 109.05,1.85 H11.3 106.7,5.43 110.68,9.41 120.36,9.41 123.77,12.82 123.77,24.52 123.38,24.91 123.38,30.23 122.97,30.63 C62.2
  BOTTOM w0.381: J1.3 100.96,23.51 ; J1.3 101.96,22.5 ; J1.3 99.96,22.5 ; J1.3 100.96,21.5 ; v1(94.56,33.38) 94.56,33.89 ; v1(94.56,33.38) 94.56,32.87 ; v1(94.56,33.38) 94.05,33.38 ; v1(94.56,33.38) 95.07,33.38 ; 25.16,30.2 v1(25.16,30.71) ; v1(25.16,30.71) 24.65,30.71 ; v1(25.16,30.71) 25.16,31.21 ; v1(37.4,6.81) 37.9,6.81 ; v1(37.4,6.81) 37.4,7.31 ; v1(37.4,6.81) 36.89,6.81 ; v1(37.4,6.81) 37.4,6.3 ; v1(92.98,9.36) 92.98,9.86 ; v1(92.98,9.36) 92.98,8.85 ; v1(92.98,9.36) 92.48,9.36 ; v1(92.98,9.36) 93.49,9.36 ; v1(46.15,11.13) 46.66,11.13 ; v1(46.15,11.13) 46.15,11.63 ; v1(46.15,11.13) 45.64,11.13 ; v1(46.15,11.13) 46.15,10.62 ; v1(63.38,36.28) 63.38,36.79 ; v1(63.38,36.28) 63.89,36.28 ; v1(63.38,36.28) 62.87,36.28 ; v1(63.38,36.28) 63.38,35.77 ; v1(46,22.07) 46.51,22.07 ; v1(46,22.07) 46,21.56 ; v1(46,22.07) 45.49,22.07 ; v1(46,22.07) 46,22.58 ; v1(68.57,21.03) 68.57,21.54 ; v1(68.57,21.03) 68.06,21.03 ; v1(68.57,21.03) 68.57,20.52 ; v1(68.57,21.03) 69.08,21.03 ; v1(107.08,27.65) 107.08,28.16 ; v1(107.08,27.65) 106.58,27.65 ; v1(107.08,27.65) 107.59,27.65 ; 89.39,17.28 v1(89.9,17.28) ; v1(89.9,17.28) 89.9,16.78 ; v1(89.9,17.28) 89.9,17.79 ; v1(89.9,17.28) 90.41,17.28 ; v1(31.98,39.34) 32.49,39.34 ; v1(31.98,39.34) 31.47,39.34 ; v1(31.98,39.34) 31.98,39.85 ; v1(31.98,39.34) 31.98,38.83 ; 103.76,29.45 v1(103.76,29.96) ; v1(103.76,29.96) 104.26,29.96 ; v1(103.76,29.96) 103.25,29.96 ; v1(103.76,29.96) 103.76,30.47 ; 86.76,30.68 v1(87.27,30.68) ; v1(87.27,30.68) 87.77,30.68 ; v1(87.27,30.68) 87.27,31.18 ; v1(87.27,30.68) 87.27,30.17 ; 67.71,6.61 v1(68.22,6.61) ; v1(68.22,6.61) 68.72,6.61 ; v1(68.22,6.61) 68.22,6.1 ; v1(68.22,6.61) 68.22,7.12 ; v1(92.63,13.64) 92.63,14.15 ; v1(92.63,13.64) 93.13,13.64 ; v1(92.63,13.64) 92.12,13.64 ; v1(92.63,13.64) 92.63,13.13 ; U6.23 83.09,52.98 ; U6.23 84.24,51.83 ; U6.23 81.94,51.83 ; U6.23 83.09,50.67 ; 39.3,39.46 v1(39.81,39.46) ; v1(39.81,39.46) 39.81,38.96 ; v1(39.81,39.46) 39.81,39.97 ; v1(39.81,39.46) 40.32,39.46 ; 34.5,25.72 v1(35.01,25.72) ; v1(35.01,25.72) 35.52,25.72 ; v1(35.01,25.72) 35.01,26.23 ; 15.01,25.08 v1(14.5,25.08) 14.5,25.59 ; 89.67,18.57 v1(89.67,19.07) ; v1(89.67,19.07) 89.67,19.58 ; v1(89.67,19.07) 90.17,19.07 ; v1(89.67,19.07) 89.16,19.07 ; 110.62,27.41 v1(110.62,27.91) ; v1(110.62,27.91) 110.62,28.42 ; v1(110.62,27.91) 110.11,27.91 ; v1(110.62,27.91) 111.13,27.91 ; J1.4 98.42,23.51 ; J1.4 97.42,22.5 ; J1.4 99.42,22.5 ; J1.4 98.42,21.5 ; v1(55.8,31.11) 55.8,31.61 ; v1(55.8,31.11) 55.29,31.11 ; v1(55.8,31.11) 56.31,31.11 ; v1(55.8,31.11) 55.8,30.6 ; 15.18,38.36 v1(15.18,38.87) ; v1(15.18,38.87) 14.67,38.87 ; v1(15.18,38.87) 15.69,38.87 ; v1(15.18,38.87) 15.18,39.38 ; 11.1,13.32 v1(11.61,13.32) ; v1(11.61,13.32) 12.12,13.32 ; v1(11.61,13.32) 11.61,13.82 ; v1(52.43,58.47) 52.43,58.97 ; v1(52.43,58.47) 52.43,57.96 ; v1(52.43,58.47) 51.92,58.47 ; v1(52.43,58.47) 52.94,58.47 ; 48.4,37.86 v1(48.4,38.37) ; v1(48.4,38.37) 47.89,38.37 ; v1(48.4,38.37) 48.91,38.37 ; v1(48.4,38.37) 48.4,38.88 ; 24.87,14.89 v1(24.87,15.4) ; v1(24.87,15.4) 24.87,15.91 ; v1(24.87,15.4) 25.38,15.4 ; v1(24.87,15.4) 24.36,15.4 ; v1(69.76,18.96) 70.27,18.96 ; v1(69.76,18.96) 69.25,18.96 ; v1(69.76,18.96) 69.76,18.45 ; v1(69.76,18.96) 69.76,19.47 ; v1(116.01,29.33) 116.01,29.84 ; v1(116.01,29.33) 116.52,29.33 ; v1(116.01,29.33) 115.5,29.33 ; v1(116.01,29.33) 116.01,28.82 ; U6.27 71.77,50.56 ; U6.27 69.26,48.05 ; U6.27 69.26,53.06 ; U6.27 66.76,50.56 ; 28.49,25.76 v1(28.49,26.26) ; v1(28.49,26.26) 27.99,26.26 ; v1(28.49,26.26) 29,26.26 ; v1(10,22.81) 10,23.32 ; v1(10,22.81) 10,22.31 ; v1(10,22.81) 9.49,22.81 ; v1(10,22.81) 10.51,22.81 ; U6.3 105.02,49.29 ; U6.3 103.86,48.13 ; U6.3 103.86,50.44 ; U6.3 102.71,49.29 ; 29,17.93 v1(29.5,17.93) ; v1(29.5,17.93) 29.5,17.42 ; v1(29.5,17.93) 30.01,17.93 ; v1(29.5,17.93) 29.5,18.44 ; v1(118.18,21.28) 118.18,21.78 ; v1(118.18,21.28) 118.18,20.77 ; v1(118.18,21.28) 117.67,21.28 ; v1(118.18,21.28) 118.69,21.28 ; v1(6.92,29.03) 6.92,29.54 ; v1(6.92,29.03) 6.41,29.03 ; v1(6.92,29.03) 6.92,28.52 ; v1(6.92,29.03) 7.43,29.03 ; v1(106.94,18.29) 107.45,18.29 ; v1(106.94,18.29) 106.94,18.8 ; v1(106.94,18.29) 106.43,18.29 ; v1(106.94,18.29) 106.94,17.78 ; v1(80.31,13.78) 80.31,14.29 ; v1(80.31,13.78) 80.82,13.78 ; v1(80.31,13.78) 79.8,13.78 ; v1(88.77,26) 89.28,26 ; v1(88.77,26) 88.77,25.49 ; v1(88.77,26) 88.77,26.51 ; v1(88.77,26) 88.26,26 ; 59.17,19.89 v1(59.17,20.4) ; v1(59.17,20.4) 59.17,20.91 ; v1(59.17,20.4) 59.68,20.4 ; v1(59.17,20.4) 58.67,20.4 ; 42.52,3.47 v1(42.52,3.98) ; v1(42.52,3.98) 43.03,3.98 ; v1(42.52,3.98) 42.52,4.49 ; 50.63,44.56 v1(50.63,45.07) ; v1(50.63,45.07) 50.12,45.07 ; v1(50.63,45.07) 51.14,45.07 ; v1(50.63,45.07) 50.63,45.58 ; v1(63.8,21.19) 64.3,21.19 ; v1(63.8,21.19) 63.8,20.68 ; v1(63.8,21.19) 63.29,21.19 ; v1(63.8,21.19) 63.8,21.69 ; 91.21,22.26 v1(91.72,22.26) ; v1(91.72,22.26) 91.72,22.77 ; v1(91.72,22.26) 92.22,22.26 ; v1(91.72,22.26) 91.72,21.75 ; v1(110.71,30.27) 111.22,30.27 ; v1(110.71,30.27) 110.71,30.77 ; v1(110.71,30.27) 110.71,29.76 ; v1(110.71,30.27) 110.2,30.27 ; v1(60.9,32.51) 60.9,33.02 ; v1(60.9,32.51) 61.41,32.51 ; v1(60.9,32.51) 60.9,32 ; 26.09,25.76 v1(26.09,26.26) ; v1(26.09,26.26) 26.6,26.26 ; v1(26.09,26.26) 25.58,26.26 ; v1(57.96,29.63) 58.47,29.63 ; v1(57.96,29.63) 57.45,29.63 ; v1(57.96,29.63) 57.96,29.12 ; v1(57.96,29.63) 57.96,30.14 ; 110.64,45.96 v1(111.15,45.96) ; v1(111.15,45.96) 111.66,45.96 ; v1(111.15,45.96) 111.15,45.45 ; v1(111.15,45.96) 111.15,46.47 ; v1(16.23,17.19) 16.74,17.19 ; v1(16.23,17.19) 15.73,17.19 ; v1(16.23,17.19) 16.23,17.69 ; v1(16.23,17.19) 16.23,16.68 ; v1(107.02,26.67) 107.53,26.67 ; v1(107.02,26.67) 107.02,26.16 ; v1(107.02,26.67) 106.52,26.67 ; 61.15,37.07 v1(61.15,37.58) ; v1(61.15,37.58) 61.15,38.08 ; v1(61.15,37.58) 60.64,37.58 ; v1(61.15,37.58) 61.66,37.58 ; 60.18,35.57 v1(59.67,35.57) 59.67,36.08 ; 98.38,14.15 v1(98.38,13.64) 97.87,13.64 ; v1(56.4,45.95) 56.9,45.95 ; v1(56.4,45.95) 55.89,45.95 ; v1(56.4,45.95) 56.4,45.45 ; v1(56.4,45.95) 56.4,46.46 ; 102.48,50.67 U6.16 ; U6.16 103.63,51.83 ; U6.16 102.48,52.98 ; U6.16 101.33,51.83 ; v1(128.65,25.16) 128.65,25.67 ; v1(128.65,25.16) 128.65,24.65 ; v1(128.65,25.16) 128.14,25.16 ; v1(128.65,25.16) 129.16,25.16 ; 6.41,25.92 v1(6.92,25.92) ; v1(6.92,25.92) 7.43,25.92 ; v1(6.92,25.92) 6.92,25.41 ; v1(30.92,12.53) 31.43,12.53 ; v1(30.92,12.53) 30.92,13.04 ; v1(30.92,12.53) 30.92,12.02 ; v1(30.92,12.53) 30.41,12.53 ; v1(89.16,37.68) 89.16,38.18 ; v1(89.16,37.68) 89.67,37.68 ; v1(89.16,37.68) 88.66,37.68 ; 81.32,43.23 v1(81.83,43.23) ; v1(81.83,43.23) 81.83,42.72 ; v1(81.83,43.23) 81.83,43.74 ; v1(81.83,43.23) 82.34,43.23 ; v1(66.68,27.54) 67.19,27.54 ; v1(66.68,27.54) 66.68,27.03 ; v1(66.68,27.54) 66.17,27.54 ; v1(66.68,27.54) 66.68,28.05 ; M3.1 7.5,55 ; M3.1 2.5,55 ; M3.1 5,52.5 ; M3.1 5,57.5 ; 77.89,9.06 v1(77.89,9.57) ; v1(77.89,9.57) 77.38,9.57 ; v1(77.89,9.57) 78.4,9.57 ; 72.58,26.13 v1(73.08,26.13) ; v1(73.08,26.13) 73.08,26.64 ; v1(73.08,26.13) 73.59,26.13 ; v1(73.08,26.13) 73.08,25.62 ; 39.02,18.01 v1(39.53,18.01) ; v1(39.53,18.01) 39.53,18.52 ; v1(39.53,18.01) 39.53,17.5 ; v1(39.53,18.01) 40.04,18.01 ; 23.59,51.82 U7.15 ; U7.15 24.74,52.97 ; U7.15 25.9,51.82 ; v1(120.72,4.52) 121.23,4.52 ; v1(120.72,4.52) 120.72,4.01 ; v1(120.72,4.52) 120.21,4.52 ; v1(120.72,4.52) 120.72,5.03 ; v1(94.13,27.27) 94.64,27.27 ; v1(94.13,27.27) 94.13,27.78 ; v1(94.13,27.27) 94.13,26.76 ; v1(94.13,27.27) 93.62,27.27 ; v1(70.57,56.79) 71.08,56.79 ; v1(70.57,56.79) 70.57,56.28 ; v1(70.57,56.79) 70.57,57.3 ; v1(70.57,56.79) 70.06,56.79 ; v1(77.28,14.72) 77.79,14.72 ; v1(77.28,14.72) 76.77,14.72 ; v1(77.28,14.72) 77.28,14.21 ; v1(79.01,19.26) 79.52,19.26 ; v1(79.01,19.26) 79.01,19.76 ; v1(79.01,19.26) 79.01,18.75 ; v1(79.01,19.26) 78.5,19.26 ; U6.26 118.81,50.56 ; U6.26 116.3,48.05 ; U6.26 116.3,53.06 ; U6.26 113.8,50.56 ; U8.1 43,41.17 ; U8.1 42,42.17 ; U8.1 41,41.17 ; U8.1 42,40.16 ; 12.64,21.85 v1(12.64,22.36) ; v1(12.64,22.36) 12.64,22.86 ; v1(12.64,22.36) 13.15,22.36 ; v1(12.64,22.36) 12.13,22.36 ; 96.08,6.44 v1(96.59,6.44) ; v1(96.59,6.44) 97.1,6.44 ; v1(96.59,6.44) 96.59,5.93 ; v1(96.59,6.44) 96.59,6.95 ; 89.98,11.57 v1(89.47,11.57) 88.96,11.57 ; 6.92,36.29 v1(6.92,36.79) ; v1(6.92,36.79) 6.41,36.79 ; v1(6.92,36.79) 7.43,36.79 ; v1(6.92,36.79) 6.92,37.3 ; 21.17,36.73 v1(21.68,36.73) ; v1(21.68,36.73) 21.68,37.24 ; v1(21.68,36.73) 22.19,36.73 ; v1(21.68,36.73) 21.68,36.22 ; v1(2.8,46.59) 2.8,47.1 ; v1(2.8,46.59) 3.31,46.59 ; v1(2.8,46.59) 2.8,46.08 ; v1(2.8,46.59) 2.29,46.59 ; U7.10 46.67,49.28 ; U7.10 45.52,50.43 ; U7.10 45.52,48.12 ; 89.6,30.8 v1(89.6,31.31) ; v1(89.6,31.31) 89.09,31.31 ; v1(89.6,31.31) 89.6,31.81 ; v1(89.6,31.31) 90.11,31.31 ; v1(94.05,24.73) 94.05,25.24 ; v1(94.05,24.73) 94.05,24.22 ; v1(94.05,24.73) 93.54,24.73 ; v1(94.05,24.73) 94.55,24.73 ; v1(82.68,38.51) 83.19,38.51 ; v1(82.68,38.51) 82.17,38.51 ; v1(82.68,38.51) 82.68,38.01 ; U6.11 82.86,49.29 ; U6.11 81.7,50.44 ; U6.11 81.7,48.13 ; U6.11 80.55,49.29 ; v1(120.76,18.14) 120.76,18.65 ; v1(120.76,18.14) 121.26,18.14 ; v1(120.76,18.14) 120.76,17.63 ; v1(120.76,18.14) 120.25,18.14 ; v1(39.25,29.7) 39.75,29.7 ; v1(39.25,29.7) 38.74,29.7 ; v1(39.25,29.7) 39.25,29.2 ; 122.5,5 M2.1 ; M2.1 127.5,5 ; M2.1 125,2.5 ; M2.1 125,7.5 ; 14.73,30.33 v1(14.73,30.84) ; v1(14.73,30.84) 14.73,31.35 ; v1(14.73,30.84) 15.24,30.84 ; v1(14.73,30.84) 14.22,30.84 ; 4.63,40.87 v1(5.14,40.87) ; v1(5.14,40.87) 5.14,40.37 ; v1(5.14,40.87) 5.64,40.87 ; v1(5.14,40.87) 5.14,41.38 ; 28.19,6.43 v1(28.19,6.93) ; v1(28.19,6.93) 27.68,6.93 ; v1(28.19,6.93) 28.19,7.44 ; v1(28.19,6.93) 28.7,6.93 ; v1(81.09,30.78) 81.09,31.28 ; v1(81.09,30.78) 81.09,30.27 ; v1(81.09,30.78) 81.6,30.78 ; v1(81.09,30.78) 80.58,30.78 ; 85.09,37.5 v1(85.6,37.5) ; v1(85.6,37.5) 85.6,38.01 ; v1(85.6,37.5) 86.11,37.5 ; 105.73,30.04 v1(105.73,30.55) ; v1(105.73,30.55) 105.73,31.06 ; v1(105.73,30.55) 105.22,30.55 ; v1(105.73,30.55) 106.24,30.55 ; 93.09,6.87 v1(93.6,6.87) ; v1(93.6,6.87) 93.6,7.38 ; v1(93.6,6.87) 93.6,6.36 ; v1(93.6,6.87) 94.1,6.87 ; 33.84,35.73 v1(34.35,35.73) ; v1(34.35,35.73) 34.35,36.24 ; v1(34.35,35.73) 34.35,35.22 ; v1(34.35,35.73) 34.85,35.73 ; 60.73,48.04 U7.26 ; U7.26 60.73,53.05 ; U7.26 63.23,50.55 ; U7.26 58.23,50.55 ; U7.27 16.19,50.55 ; U7.27 13.69,53.05 ; U7.27 11.19,50.55 ; U7.27 13.69,48.04 ; v1(104.38,18.5) 104.89,18.5 ; v1(104.38,18.5) 103.87,18.5 ; v1(104.38,18.5) 104.38,19.01 ; v1(104.38,18.5) 104.38,18 ; v1(32.33,14.99) 32.83,14.99 ; v1(32.33,14.99) 32.33,14.48 ; v1(32.33,14.99) 32.33,15.5 ; v1(32.33,14.99) 31.82,14.99 ; 114.39,38.11 v1(114.9,38.11) ; v1(114.9,38.11) 114.9,38.62 ; v1(114.9,38.11) 114.9,37.61 ; v1(114.9,38.11) 115.4,38.11 ; v1(52.45,12.01) 52.96,12.01 ; v1(52.45,12.01) 52.45,11.5 ; v1(52.45,12.01) 52.45,12.51 ; v1(52.45,12.01) 51.94,12.01 ; v1(61.7,15.97) 62.21,15.97 ; v1(61.7,15.97) 61.7,15.46 ; v1(61.7,15.97) 61.7,16.47 ; v1(61.7,15.97) 61.19,15.97 ; 110.94,19.21 v1(110.94,19.72) ; v1(110.94,19.72) 111.45,19.72 ; v1(110.94,19.72) 110.43,19.72 ; v1(110.94,19.72) 110.94,20.23 ; v1(37.25,39.45) 37.25,39.96 ; v1(37.25,39.45) 36.74,39.45 ; v1(37.25,39.45) 37.76,39.45 ; v1(37.25,39.45) 37.25,38.94 ; 101.4,10.76 v1(101.4,11.26) ; v1(101.4,11.26) 100.89,11.26 ; v1(101.4,11.26) 101.91,11.26 ; v1(101.4,11.26) 101.4,11.77 ; 103.76,28.14 v1(104.27,28.14) ; v1(104.27,28.14) 104.77,28.14 ; v1(104.27,28.14) 104.27,28.64 ; v1(104.27,28.14) 104.27,27.63 ; U6.24 80.32,52.98 ; U6.24 80.32,50.67 ; U6.24 81.47,51.83 ; U6.24 79.17,51.83 ; U7.12 51.06,50.43 ; U7.12 52.21,49.28 ; U7.12 49.91,49.28 ; U7.12 51.06,48.12 ; v1(21.79,4.92) 22.3,4.92 ; v1(21.79,4.92) 21.28,4.92 ; v1(21.79,4.92) 21.79,4.41 ; v1(21.79,4.92) 21.79,5.43 ; 83,11.72 v1(83.51,11.72) 84.02,11.72 ; 63.44,27.02 v1(63.95,27.02) ; v1(63.95,27.02) 64.46,27.02 ; v1(63.95,27.02) 63.95,27.53 ; v1(63.95,27.02) 63.95,26.51 ; v1(13.76,10.36) 14.27,10.36 ; v1(13.76,10.36) 13.25,10.36 ; v1(13.76,10.36) 13.76,9.86 ; v1(13.76,10.36) 13.76,10.87 ; v1(48.75,32.41) 48.75,32.92 ; v1(48.75,32.41) 49.25,32.41 ; v1(48.75,32.41) 48.24,32.41 ; v1(48.75,32.41) 48.75,31.9 ; 38.89,24.18 v1(39.4,24.18) ; v1(39.4,24.18) 39.91,24.18 ; v1(39.4,24.18) 39.4,23.67 ; v1(39.4,24.18) 39.4,24.68 ; 110.03,26.66 v1(110.53,26.66) ; v1(110.53,26.66) 110.53,27.17 ; v1(110.53,26.66) 111.04,26.66 ; v1(110.53,26.66) 110.53,26.15 ; 77.37,23.67 v1(77.87,23.67) 77.87,23.17 ; 21.84,18.44 v1(21.84,18.95) ; v1(21.84,18.95) 21.34,18.95 ; v1(21.84,18.95) 21.84,19.46 ; v1(21.84,18.95) 22.35,18.95 ; 2.79,38.94 v1(2.79,39.45) ; v1(2.79,39.45) 2.28,39.45 ; v1(2.79,39.45) 3.3,39.45 ; v1(2.79,39.45) 2.79,39.96 ; 98.54,17.49 v1(99.04,17.49) ; v1(99.04,17.49) 99.04,17.99 ; v1(99.04,17.49) 99.04,16.98 ; v1(99.04,17.49) 99.55,17.49 ; 122.5,55 M4.1 ; M4.1 125,52.5 ; M4.1 127.5,55 ; M4.1 125,57.5 ; v1(119.42,38.78) 119.42,39.29 ; v1(119.42,38.78) 119.93,38.78 ; v1(119.42,38.78) 118.91,38.78 ; v1(119.42,38.78) 119.42,38.27 ; 69.89,31.67 v1(69.38,31.67) 68.87,31.67 ; v1(36.58,46.77) 36.58,47.28 ; v1(36.58,46.77) 36.58,46.27 ; v1(36.58,46.77) 37.09,46.77 ; v1(36.58,46.77) 36.07,46.77 ; U10.1 101.35,40.42 ; U10.1 99.34,40.42 ; U10.1 100.34,41.43 ; v1(89.8,20.86) 90.31,20.86 ; v1(89.8,20.86) 89.8,21.37 ; v1(89.8,20.86) 89.3,20.86 ; v1(89.8,20.86) 89.8,20.36 ; v1(15.83,36.9) 16.34,36.9 ; v1(15.83,36.9) 15.83,36.39 ; v1(15.83,36.9) 15.83,37.4 ; v1(15.83,36.9) 15.32,36.9 ; 6.41,33.69 v1(6.92,33.69) 7.43,33.69 ; 44.48,43.53 v1(44.99,43.53) ; v1(44.99,43.53) 44.99,44.04 ; v1(44.99,43.53) 44.99,43.02 ; v1(44.99,43.53) 45.5,43.53 ; v1(21.78,16.73) 21.78,17.24 ; v1(21.78,16.73) 21.78,16.23 ; v1(21.78,16.73) 21.27,16.73 ; v1(21.78,16.73) 22.28,16.73 ; v1(71.52,27.05) 71.52,27.56 ; v1(71.52,27.05) 72.03,27.05 ; v1(71.52,27.05) 71.01,27.05 ; 12.5,45.28 v1(12.5,45.79) ; v1(12.5,45.79) 11.99,45.79 ; v1(12.5,45.79) 12.5,46.3 ; v1(12.5,45.79) 13.01,45.79 ; 86.98,39.87 v1(86.98,40.38) ; v1(86.98,40.38) 86.98,40.89 ; v1(86.98,40.38) 86.47,40.38 ; v1(86.98,40.38) 87.49,40.38 ; v1(37.58,16.23) 37.58,16.74 ; v1(37.58,16.23) 38.09,16.23 ; v1(37.58,16.23) 37.07,16.23 ; v1(37.58,16.23) 37.58,15.72 ; 66.53,11.69 v1(67.03,11.69) ; v1(67.03,11.69) 67.54,11.69 ; v1(67.03,11.69) 67.03,12.2 ; 81.61,8.87 v1(81.61,9.38) ; v1(81.61,9.38) 82.12,9.38 ; v1(81.61,9.38) 81.1,9.38 ; v1(81.61,9.38) 81.61,9.88 ; 86.67,37.54 v1(87.17,37.54) ; v1(87.17,37.54) 87.68,37.54 ; v1(87.17,37.54) 87.17,38.05 ; 63.71,6.54 v1(63.71,7.05) ; v1(63.71,7.05) 64.22,7.05 ; v1(63.71,7.05) 63.2,7.05 ; v1(63.71,7.05) 63.71,7.56 ; v1(81.03,28.6) 81.53,28.6 ; v1(81.03,28.6) 81.03,28.1 ; v1(81.03,28.6) 81.03,29.11 ; v1(81.03,28.6) 80.52,28.6 ; 53.17,17.32 v1(53.17,16.81) 53.68,16.81 ; 57.85,11.69 v1(58.36,11.69) ; v1(58.36,11.69) 58.36,12.2 ; v1(58.36,11.69) 58.87,11.69 ; 22.68,35.9 v1(22.68,36.41) ; v1(22.68,36.41) 22.68,36.91 ; v1(22.68,36.41) 22.17,36.41 ; v1(22.68,36.41) 23.18,36.41 ; v1(53.55,38.22) 54.06,38.22 ; v1(53.55,38.22) 53.55,37.71 ; v1(53.55,38.22) 53.04,38.22 ; 19,6.6 v1(19,7.11) ; v1(19,7.11) 18.49,7.11 ; v1(19,7.11) 19.5,7.11 ; 25.48,38.55 v1(25.48,39.06) ; v1(25.48,39.06) 24.97,39.06 ; v1(25.48,39.06) 25.48,39.57 ; v1(25.48,39.06) 25.99,39.06 ; v1(36.4,35.65) 36.91,35.65 ; v1(36.4,35.65) 36.4,35.14 ; v1(36.4,35.65) 36.4,36.15 ; v1(36.4,35.65) 35.89,35.65 ; H11.3 106.7,5.7 ; H11.3 108.2,4.19 ; H11.3 106.7,2.69 ; v1(75.6,31.56) 76.11,31.56 ; v1(75.6,31.56) 75.6,31.05 ; v1(75.6,31.56) 75.09,31.56 ; 12.71,31.92 v1(13.22,31.92) ; v1(13.22,31.92) 13.22,31.41 ; v1(13.22,31.92) 13.22,32.43 ; v1(13.22,31.92) 13.72,31.92 ; v1(26.13,39.74) 26.64,39.74 ; v1(26.13,39.74) 26.13,39.24 ; v1(26.13,39.74) 25.62,39.74 ; 48.29,48.12 U7.11 ; U7.11 48.29,50.43 ; U7.11 49.44,49.28 ; U7.11 47.14,49.28 ; 52.68,49.28 U7.13 ; U7.13 53.83,48.12 ; U7.13 53.83,50.43 ; U7.13 54.98,49.28 ; U7.14 21.97,52.97 ; U7.14 20.82,51.82 ; U7.14 23.13,51.82 ; U7.14 21.97,50.66 ; v1(89.45,13.64) 89.45,14.15 ; v1(89.45,13.64) 89.45,13.13 ; v1(89.45,13.64) 88.94,13.64 ; v1(89.45,13.64) 89.96,13.64 ; 69.98,40.11 v1(70.49,40.11) ; v1(70.49,40.11) 71,40.11 ; v1(70.49,40.11) 70.49,40.62 ; 34.54,42.69 v1(35.05,42.69) ; v1(35.05,42.69) 35.05,43.19 ; v1(35.05,42.69) 35.55,42.69 ; v1(35.05,42.69) 35.05,42.18 ; 47.66,16.8 v1(48.17,16.8) ; v1(48.17,16.8) 48.17,16.29 ; v1(48.17,16.8) 48.17,17.31 ; v1(48.17,16.8) 48.68,16.8 ; v1(45.78,35.3) 46.29,35.3 ; v1(45.78,35.3) 45.27,35.3 ; v1(45.78,35.3) 45.78,34.79 ; v1(45.78,35.3) 45.78,35.8 ; v1(101.94,45.93) 101.94,46.44 ; v1(101.94,45.93) 101.43,45.93 ; v1(101.94,45.93) 101.94,45.43 ; v1(101.94,45.93) 102.45,45.93 ; 117.84,45.98 v1(118.35,45.98) ; v1(118.35,45.98) 118.35,46.49 ; v1(118.35,45.98) 118.35,45.47 ; v1(118.35,45.98) 118.86,45.98 ; 18.21,23.51 v1(18.21,24.02) ; v1(18.21,24.02) 18.21,24.52 ; v1(18.21,24.02) 17.7,24.02 ; v1(18.21,24.02) 18.72,24.02 ; v1(64.14,11.69) 64.14,12.2 ; v1(64.14,11.69) 63.63,11.69 ; v1(64.14,11.69) 64.65,11.69 ; 83.45,14.44 v1(83.45,13.93) 82.95,13.93 ; 6.41,35.24 v1(6.92,35.24) ; v1(6.92,35.24) 7.43,35.24 ; v1(6.92,35.24) 6.92,35.75 ; v1(61.37,11.69) 61.37,12.2 ; v1(61.37,11.69) 60.86,11.69 ; v1(61.37,11.69) 61.88,11.69 ; v1(90.32,14.51) 90.32,15.02 ; v1(90.32,14.51) 89.81,14.51 ; v1(90.32,14.51) 90.32,14 ; v1(90.32,14.51) 90.82,14.51 ; 73.31,48.15 v1(73.31,48.66) ; v1(73.31,48.66) 72.8,48.66 ; v1(73.31,48.66) 73.31,49.17 ; v1(73.31,48.66) 73.82,48.66 ; 30.82,29.8 v1(31.33,29.8) 31.84,29.8 ; v1(78.79,37.48) 78.79,37.99 ; v1(78.79,37.48) 79.3,37.48 ; v1(78.79,37.48) 78.28,37.48 ; 106.52,15.43 v1(107.03,15.43) ; v1(107.03,15.43) 107.03,15.94 ; v1(107.03,15.43) 107.54,15.43 ; v1(107.03,15.43) 107.03,14.92 ; 60.16,25.41 v1(60.67,25.41) ; v1(60.67,25.41) 60.67,25.91 ; v1(60.67,25.41) 61.18,25.41 ; 6.41,24.37 v1(6.92,24.37) ; v1(6.92,24.37) 6.92,24.88 ; v1(6.92,24.37) 7.43,24.37 ; v1(93.74,42.21) 93.74,42.72 ; v1(93.74,42.21) 94.25,42.21 ; v1(93.74,42.21) 93.74,41.7 ; v1(93.74,42.21) 93.23,42.21 ; v1(35.35,34.6) 35.86,34.6 ; v1(35.35,34.6) 34.85,34.6 ; v1(35.35,34.6) 35.35,35.11 ; 77.6,29.11 v1(77.6,28.6) 77.09,28.6 ; 55.37,12.2 v1(55.37,11.69) 55.88,11.69 ; 30.84,20.68 v1(31.35,20.68) 31.86,20.68 ; v1(2.3,19.34) 2.81,19.34 ; v1(2.3,19.34) 2.3,18.83 ; v1(2.3,19.34) 1.79,19.34 ; v1(2.3,19.34) 2.3,19.85 ; 76.51,37.61 v1(76.51,38.12) ; v1(76.51,38.12) 77.02,38.12 ; v1(76.51,38.12) 76.01,38.12 ; 22.79,10.69 v1(22.28,10.69) 22.28,11.2 ; 73.95,11.58 v1(74.46,11.58) 74.97,11.58 ; 93.61,26 v1(94.12,26) ; v1(94.12,26) 94.62,26 ; v1(94.12,26) 94.12,26.51 ; v1(94.12,26) 94.12,25.49 ; 73.95,22.73 v1(73.95,23.24) 73.95,23.75 ; v1(94.17,28.54) 94.17,29.05 ; v1(94.17,28.54) 94.67,28.54 ; v1(94.17,28.54) 94.17,28.03 ; v1(94.17,28.54) 93.66,28.54 ; v1(20.67,22.77) 21.18,22.77 ; v1(20.67,22.77) 20.67,23.28 ; v1(20.67,22.77) 20.16,22.77 ; 82.71,23.93 v1(83.22,23.93) ; v1(83.22,23.93) 83.22,24.44 ; v1(83.22,23.93) 83.22,23.42 ; v1(50.88,26.72) 51.39,26.72 ; v1(50.88,26.72) 50.88,27.23 ; v1(50.88,26.72) 50.88,26.21 ; v1(50.88,26.72) 50.37,26.72 ; v1(73.26,16.7) 73.26,17.2 ; v1(73.26,16.7) 73.77,16.7 ; v1(73.26,16.7) 72.75,16.7 ; 6.41,32.13 v1(6.92,32.13) ; v1(6.92,32.13) 6.92,31.63 ; v1(6.92,32.13) 7.43,32.13 ; v1(109.75,19.76) 109.75,20.27 ; v1(109.75,19.76) 110.26,19.76 ; v1(109.75,19.76) 109.24,19.76 ; v1(109.75,19.76) 109.75,19.25 ; 73.59,14.64 v1(74.1,14.64) 74.61,14.64 ; v1(9.76,30.58) 9.76,31.09 ; v1(9.76,30.58) 10.27,30.58 ; v1(9.76,30.58) 9.25,30.58 ; v1(9.76,30.58) 9.76,30.07 ; 5,2.5 M1.1 ; M1.1 7.5,5 ; M1.1 2.5,5 ; M1.1 5,7.5 ; v1(97.34,34.3) 97.85,34.3 ; v1(97.34,34.3) 96.83,34.3 ; v1(97.34,34.3) 97.34,33.8 ; 84.31,15.33 v1(84.31,14.83) 83.8,14.83 ; 6.41,27.47 v1(6.92,27.47) ; v1(6.92,27.47) 6.92,27.98 ; v1(6.92,27.47) 7.43,27.47 ; 59.87,42.79 v1(59.87,43.3) ; v1(59.87,43.3) 59.87,43.81 ; v1(59.87,43.3) 60.38,43.3 ; v1(59.87,43.3) 59.37,43.3 ; v1(78.26,16.67) 78.77,16.67 ; v1(78.26,16.67) 78.26,17.18 ; v1(78.26,16.67) 77.75,16.67 ; 20.52,23.49 v1(20.52,23.99) 20.01,23.99 ; 77.86,11.66 v1(77.35,11.66) 76.84,11.66 ; v1(84.92,7.11) 84.92,7.62 ; v1(84.92,7.11) 84.42,7.11 ; v1(84.92,7.11) 84.92,6.6 ; v1(84.92,7.11) 85.43,7.11 ; 93.13,11.57 v1(92.62,11.57) 92.12,11.57 ; 74.16,19.96 v1(74.16,19.45) 74.67,19.45 ; v1(27.13,10.52) 27.64,10.52 ; v1(27.13,10.52) 26.62,10.52 ; v1(27.13,10.52) 27.13,11.03 ; v1(27.13,10.52) 27.13,10.01 ; 52.39,21.03 v1(52.39,21.54) ; v1(52.39,21.54) 52.89,21.54 ; v1(52.39,21.54) 51.88,21.54 ; v1(52.39,21.54) 52.39,22.04 ; 85.94,21.29 v1(85.43,21.29) 85.43,21.8 ; 22.1,20.5 v1(21.59,20.5) 21.59,19.99 ; 74.04,21.87 v1(74.04,21.37) 74.04,20.86 ; 83.43,17.54 v1(83.94,17.54) ; v1(83.94,17.54) 84.45,17.54 ; v1(83.94,17.54) 83.94,17.03 ; v1(83.94,17.54) 83.94,18.05
  BOTTOM w0.635: M2.1 127.14,7.14 127.14,52.86 M4.1
  BOTTOM w0.889: H11.3 106.46,4.19 103.43,7.23 103.43,20.04 J1.3
